# Altium PCB Board2.PcbDoc (part 1 of 2)
Units mil, origin at the board's own origin, x right, y up, seen from the top; angles counter-clockwise.
Board outline 9249 x 8662 mil, 4 copper layers (Top Layer, VCC, GND, Bottom Layer); 176 components, 329 nets, 1628 pads, 337 vias.
Unrouted connection lines stored in the file: 397.
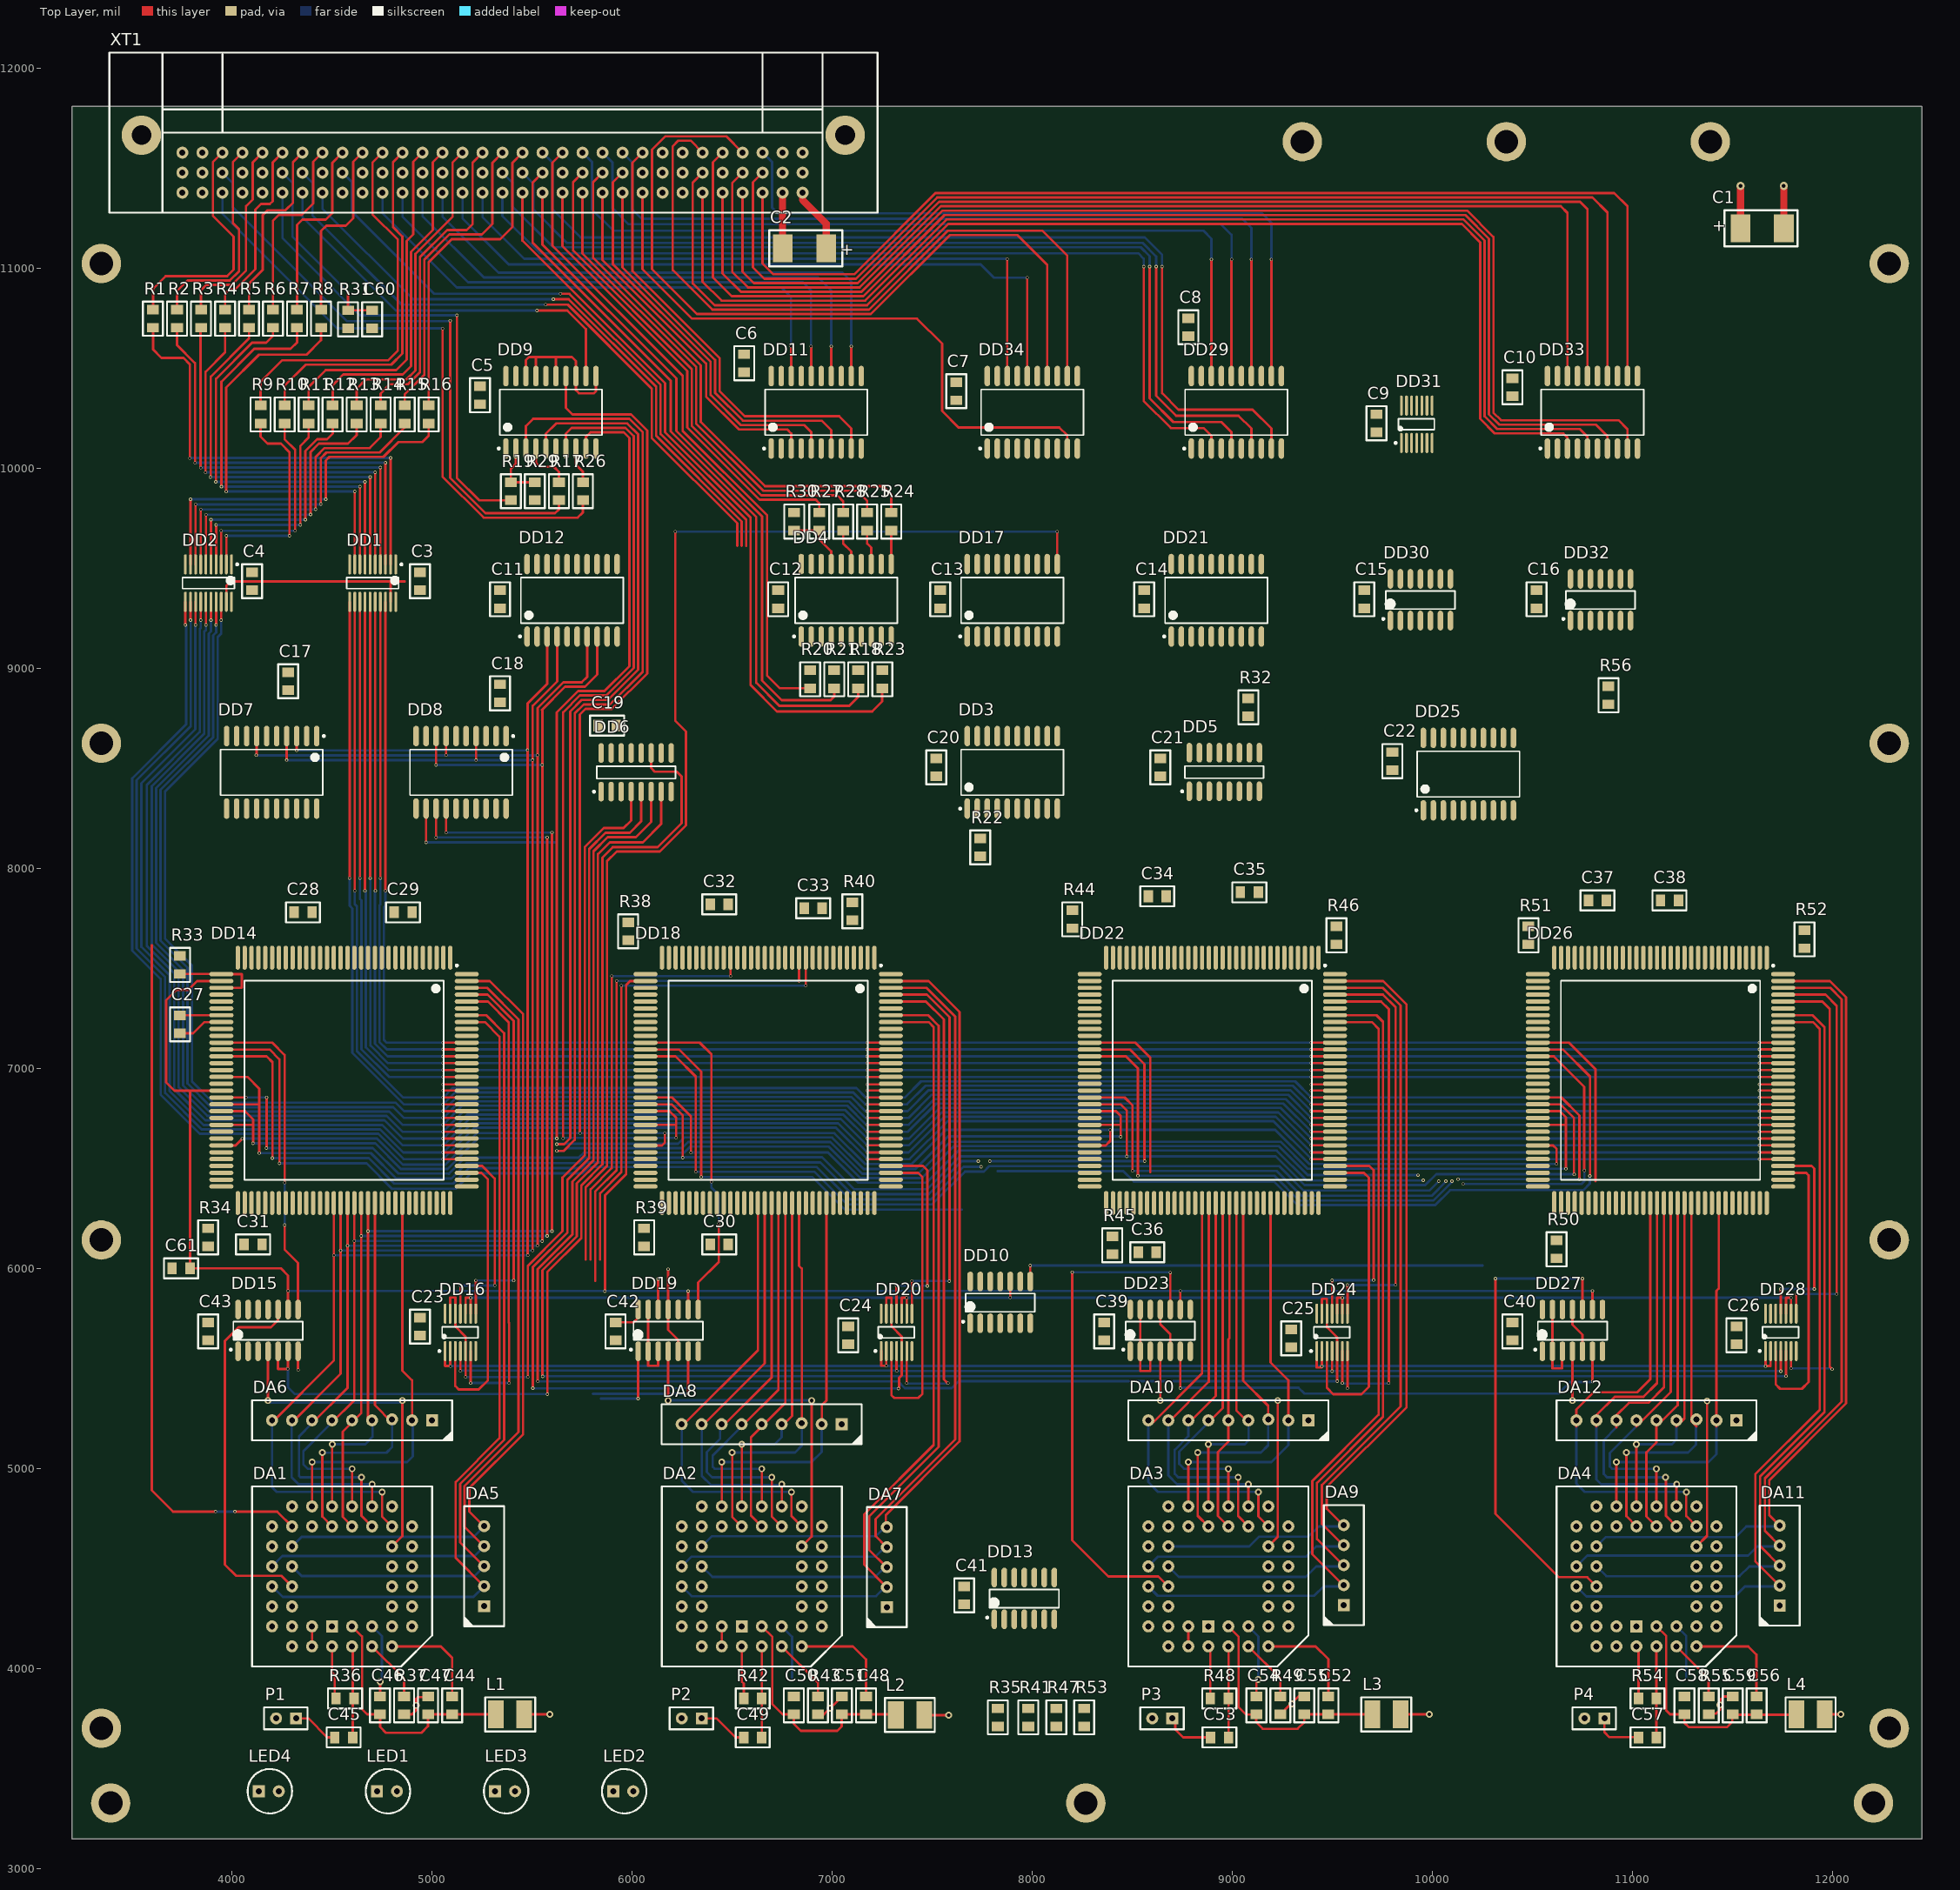
[diagram p0: Top Layer view]
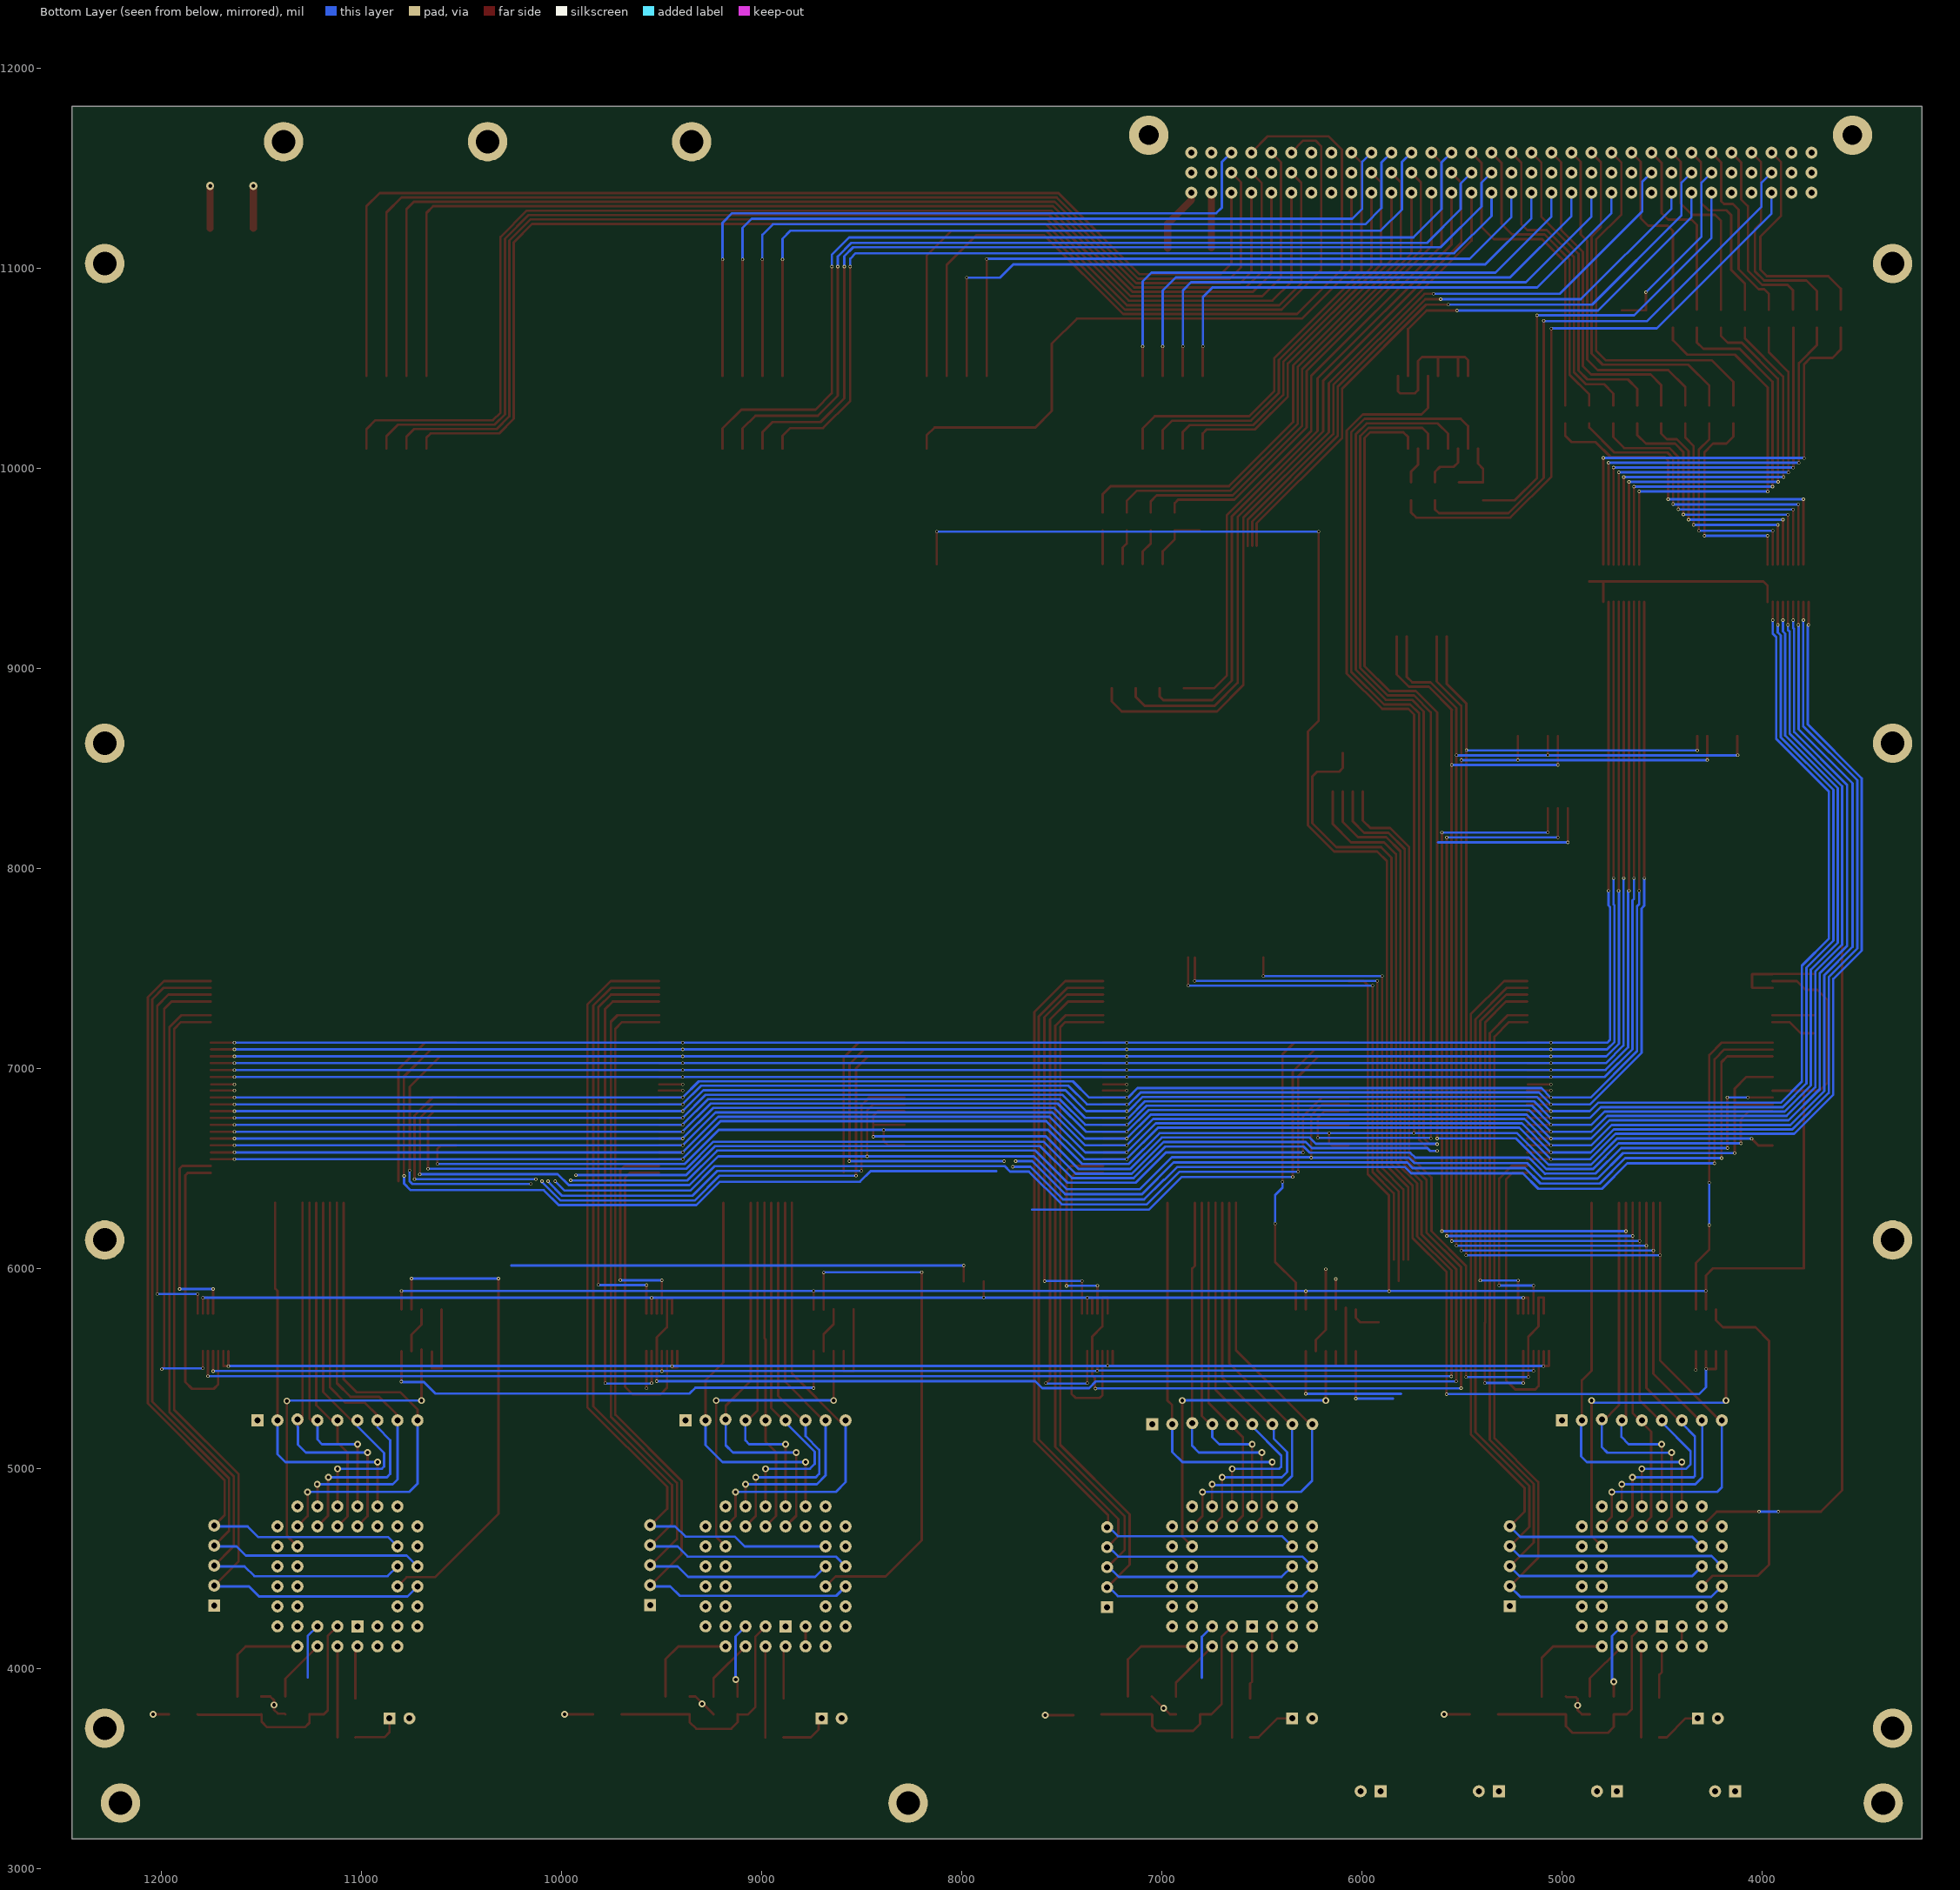
[diagram p1: Bottom Layer view, seen from below]
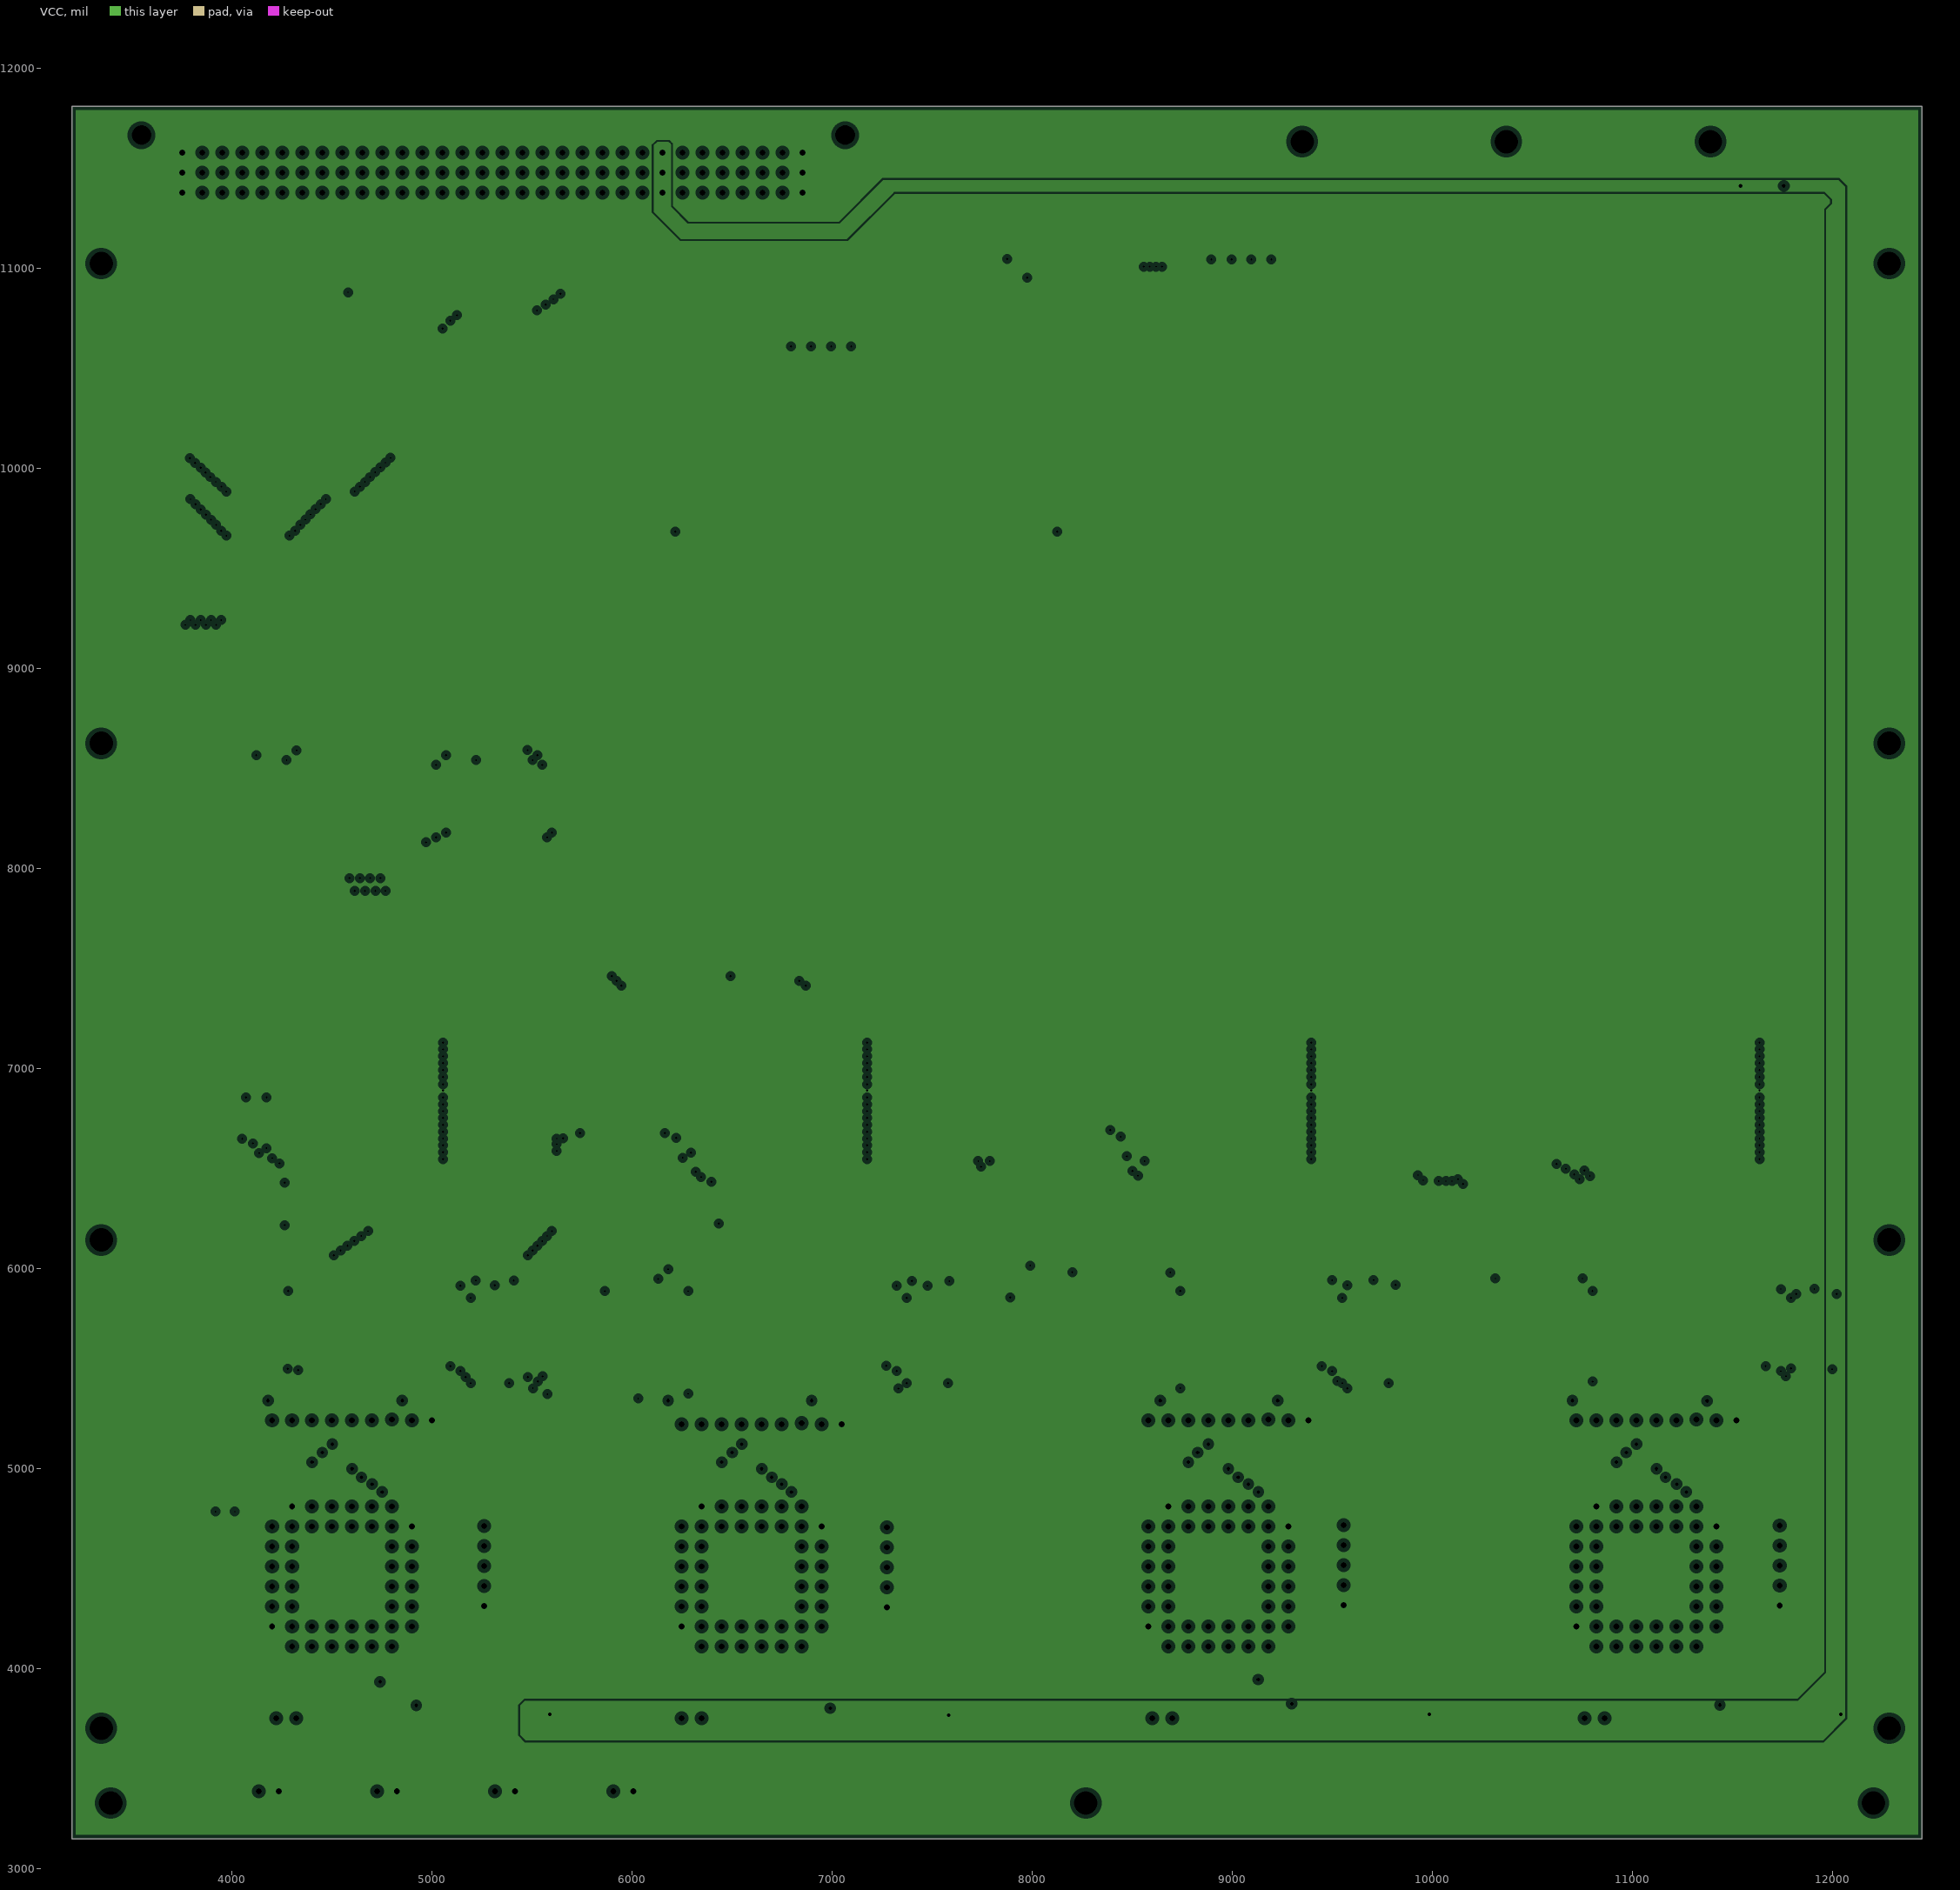
[diagram p2: VCC, clearances drawn from the general rule]
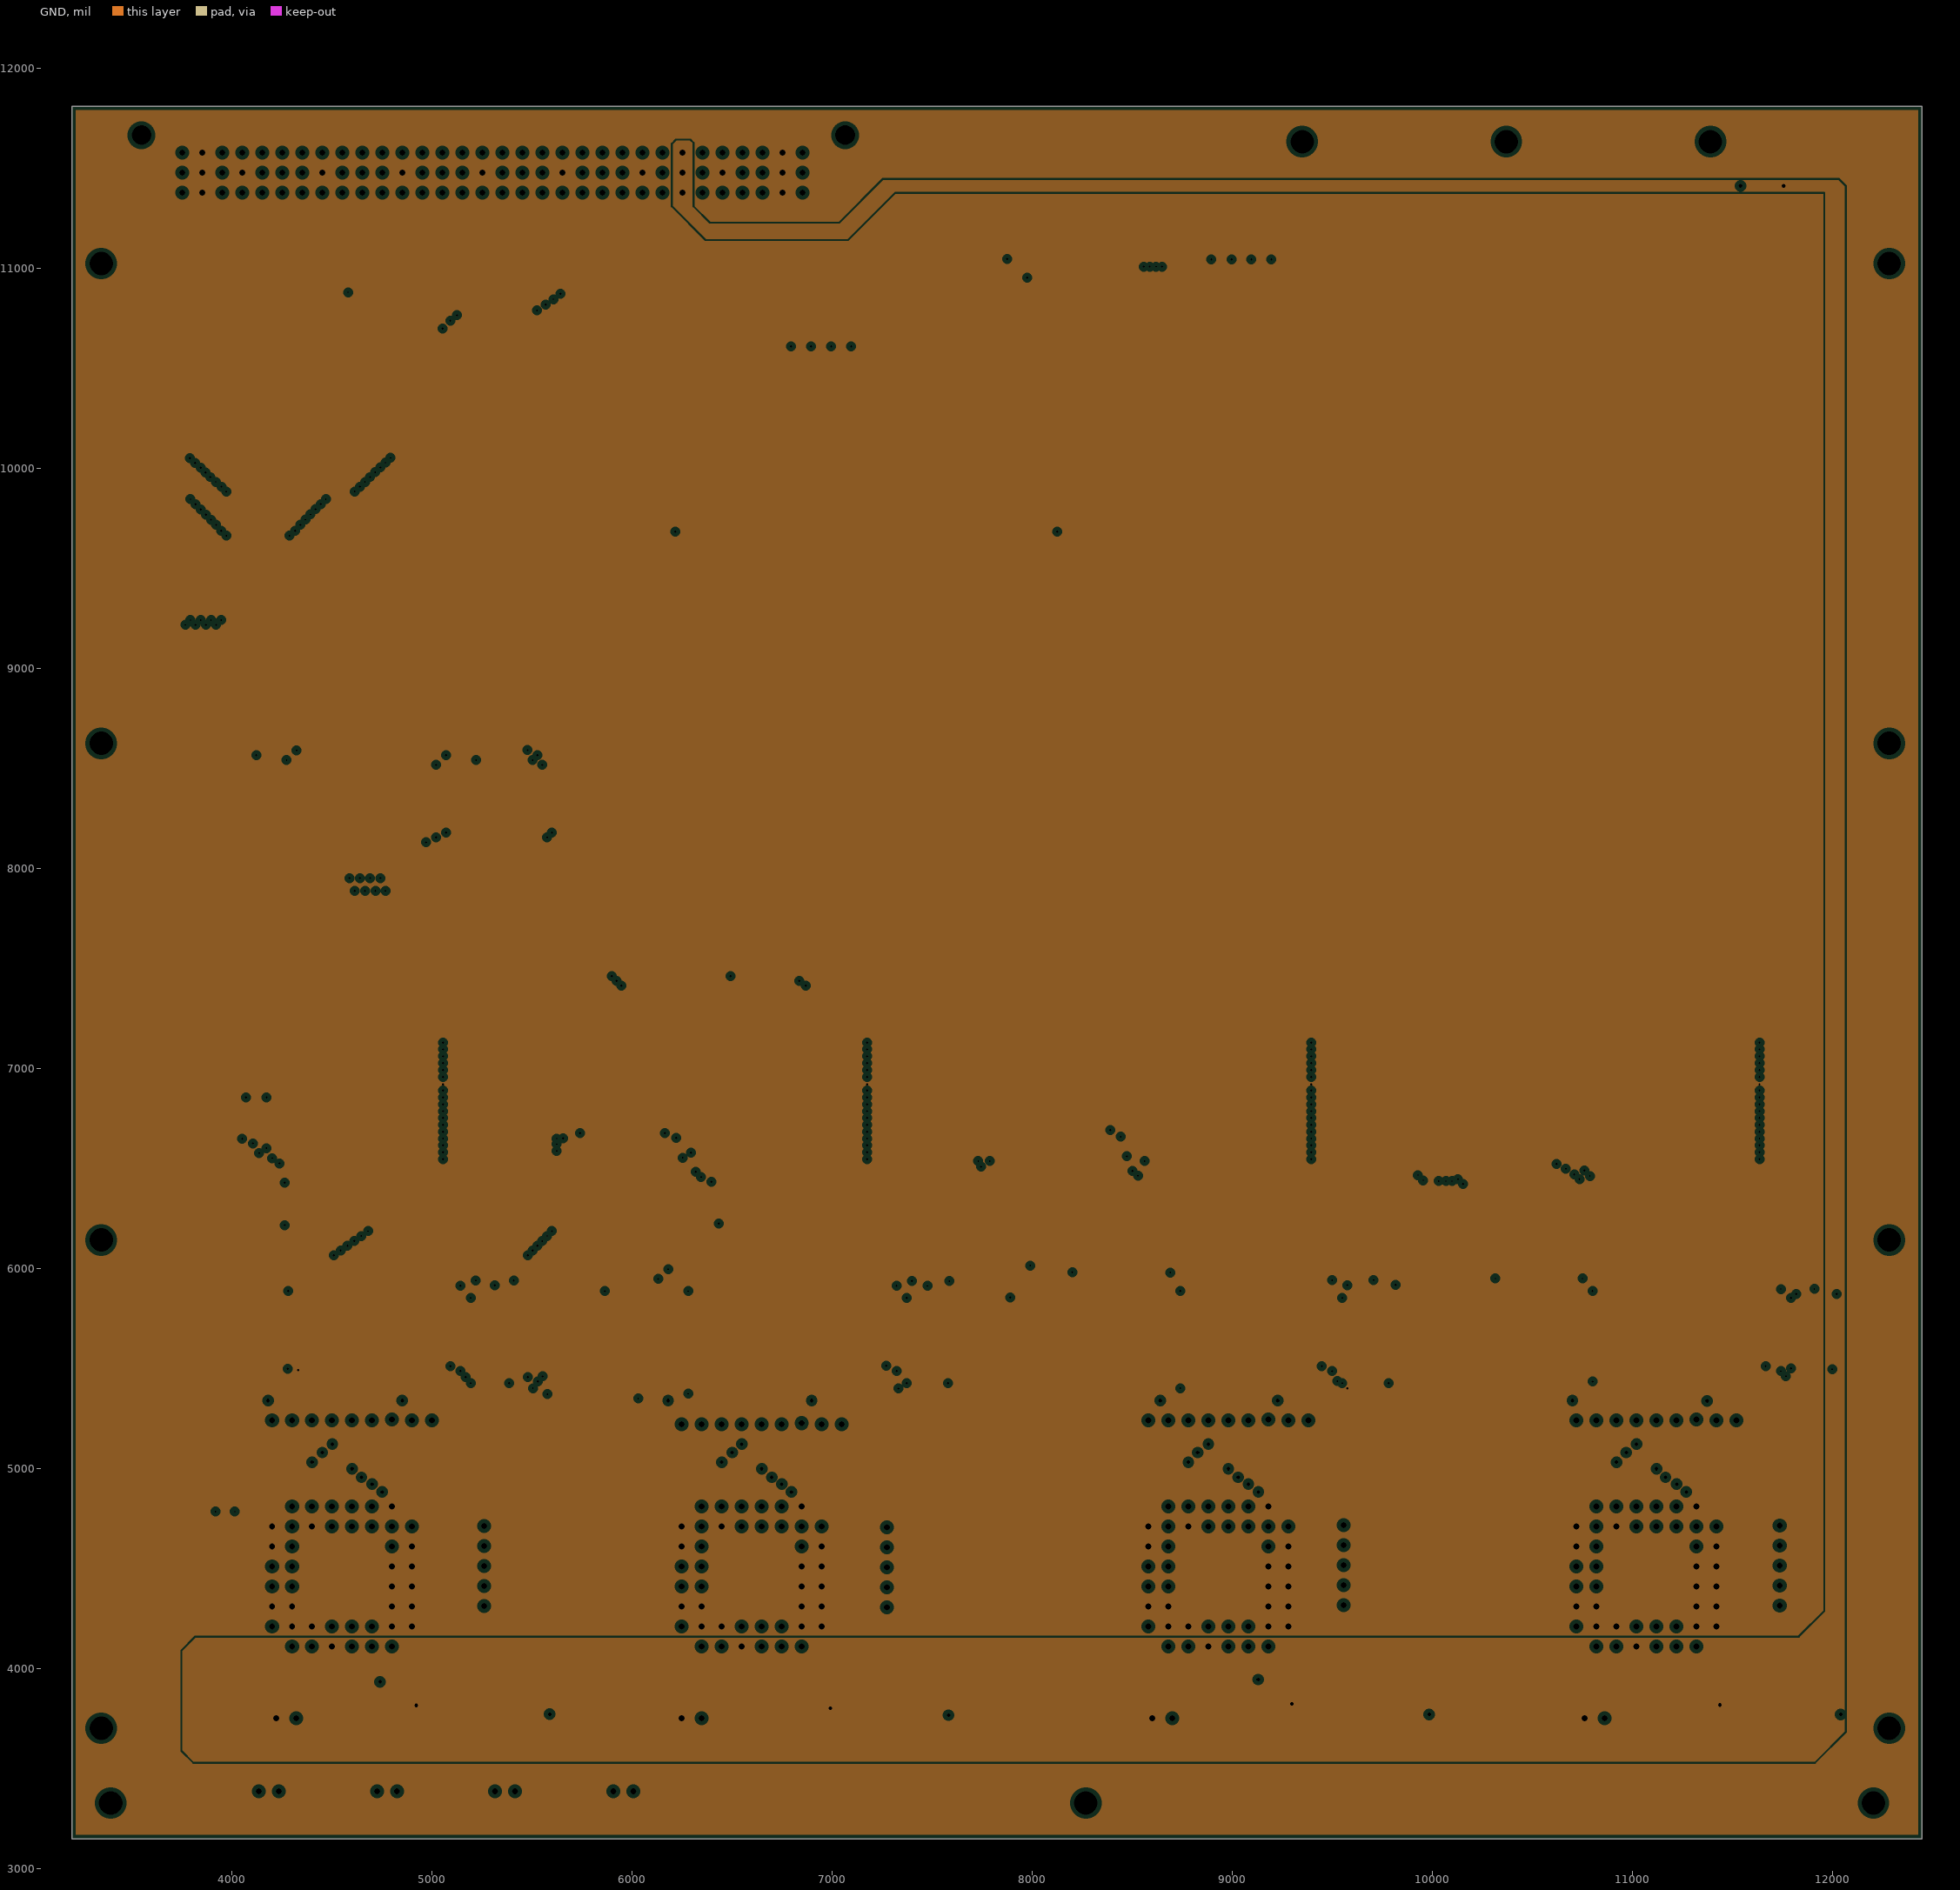
[diagram p3: GND, clearances drawn from the general rule]

## Layer stack, top to bottom
Top Layer: signal copper 1.4
Dielectric: core 12.6, FR-4, Dk 4.8
VCC: plane copper 1.4, net (Multiple Nets)
Dielectric: prepreg 12.6, FR-4, Dk 4.8
GND: plane copper 1.4, net (Multiple Nets)
Dielectric: core 12.6, FR-4, Dk 4.8
Bottom Layer: signal copper 1.4

## Board outline
3199,3148 3199,11810 12448,11810 12448,3148 3199,3148

## Design rules (kind name [scope] priority, off if disabled: settings)
Clearance [All] p1: gap=10
ComponentClearance [All] p1: gap=10 collisioncheckmode=3 verticalgap=10
PlaneClearance [All] p1: clearance=20
PlaneConnect [All] p1: planeconnectstyle=Relief reliefexpansion=20 reliefentries=4 reliefconductorwidth=10 reliefairgap=10
PolygonConnect [All] p1: connectstyle=Relief reliefconductorwidth=10 reliefentries=4 polygonreliefangle="90 Angle"
RoutingVias [All] p1: holewidth=20 width=36 viastyle="Through Hole" minholewidth=8 minwidth=10 maxholewidth=28 maxwidth=50
SolderMaskExpansion [All] p1: expansion=4
TestPointUsage [All] p1: valid=0 allowmultiple=FALSE
Testpoint [All] p1: side=15 testpointundercomponent=TRUE minsize=40 maxsize=100 preferedsize=60 minholesize=0 maxholesize=40 preferedholesize=32 testpointgrid=1 style=1023 order=0123456789
Width [All] p1: maxlimit=36 minlimit=12 preferedwidth=12
16 further rules are at their usual default settings.

## Classes and differential pairs
component class Sheet7: * DD30 DD31 DD32 DD33 DD34 LED1 LED2 LED3 LED4 P1 P2 P3 P4 P5 P6 P7 P8 P9 R56
component class Sheet6: C56 C57 C58 C59 DA4 DA11 DA12 DD13 DD26 DD27 DD28 DD29 L4 R35 R41 R47 R50 R51 R52 R53 R54 R55
component class Sheet5: C52 C53 C54 C55 DA3 DA9 DA10 DD22 DD23 DD24 DD25 L3 R44 R45 R46 R48 R49
component class Sheet4: C48 C49 C50 C51 DA2 DA7 DA8 DD18 DD19 DD20 DD21 L2 R38 R39 R40 R42 R43
component class Sheet3: C44 C45 C46 C47 C61 DA1 DA5 DA6 DD14 DD15 DD16 DD17 L1 R33 R34 R36 R37
component class Sheet2: DD1 DD2 DD3 DD4 DD5 DD6 DD7 DD8 DD9 DD10 DD11 DD12 R32
component class Sheet1: * C1 C2 C3 C4 C5 C6 C7 C8 C9 C10 C11 C12 C13 C14 C15 C16 C17 C18 C19 C20 C21 C22 C23 C24 C25 C26 C27 C28 C29 C30 C31 C32 C33 C34 C35 C36 C37 C38 C39 C40 C41 C42 C43 C60 R1 R2 R3 R4 R5 R6 R7 R8 R9 R10 R11 R12 R13 R14 R15 R16 R17 R18 R19 R20 R21 R22 R23 R24 R25 R26 R27 R28 R29 R30 R31 XT1

## Components (designator, comment, footprint, x,y, rotation, side; value= is the part's Value field where it differs from the comment)
C1 "Cap2" B(1812) 11540,11200 r0 top
C2 "Cap2" B(1812) 6970,11100 r180 top
C3 "Cap" 0805 4940,9480 r270 top
C4 "Cap" 0805 4100,9480 r270 top
C5 "Cap" 0805 5240,10320 r90 top
C6 "Cap" 0805 6560,10480 r90 top
C7 "Cap" 0805 7620,10340 r90 top
C8 "Cap" 0805 8780,10660 r90 top
C9 "Cap" 0805 9720,10180 r90 top
C10 "Cap" 0805 10400,10360 r90 top
C11 "Cap" 0805 5340,9300 r90 top
C12 "Cap" 0805 6730,9300 r90 top
C13 "Cap" 0805 7540,9300 r90 top
C14 "Cap" 0805 8560,9300 r90 top
C15 "Cap" 0805 9660,9300 r90 top
C16 "Cap" 0805 10520,9300 r90 top
C17 "Cap" 0805 4280,8980 r270 top
C18 "Cap" 0805 5340,8920 r270 top
C19 "Cap" 0805 5920,8713 r180 top
C20 "Cap" 0805 7520,8460 r90 top
C21 "Cap" 0805 8640,8460 r90 top
C22 "Cap" 0805 9800,8491 r90 top
C23 "Cap" 0805 4940,5664 r90 top
C24 "Cap" 0805 7080,5620 r90 top
C25 "Cap" 0805 9294,5605 r90 top
C26 "Cap" 0805 11520,5620 r90 top
C27 "Cap" 0805 3740,7175 r90 top
C28 "Cap" 0805 4400,7780 r180 top
C29 "Cap" 0805 4900,7780 r180 top
C30 "Cap" 0805 6480,6120 r180 top
C31 "Cap" 0805 4060,6120 r0 top
C32 "Cap" 0805 6480,7820 r180 top
C33 "Cap" 0805 6860,7800 r0 top
C34 "Cap" 0805 8580,7860 r0 top
C35 "Cap" 0805 9040,7880 r0 top
C36 "Cap" 0805 8620,6080 r180 top
C37 "Cap" 0805 10780,7840 r0 top
C38 "Cap" 0805 11140,7840 r0 top
C39 "Cap" 0805 8360,5640 r90 top
C40 "Cap" 0805 10400,5640 r90 top
C41 "Cap" 0805 7660,4320 r90 top
C42 "Cap" 0805 5917,5640 r90 top
C43 "Cap" 0805 3880,5640 r90 top
C44 "Cap" 0805 5100,3770 r90 top
C45 "Cap" 0805 4603,3655 r180 top
C46 "Cap" 0805 4740,3770 r90 top
C47 "Cap" 0805 4980,3860 r270 top
C48 "Cap" 0805 7169,3770 r90 top
C49 "Cap" 0805 6648,3655 r180 top
C50 "Cap" 0805 6808,3770 r90 top
C51 "Cap" 0805 7049,3860 r270 top
C52 "Cap" 0805 9480,3770 r90 top
C53 "Cap" 0805 8981,3655 r180 top
C54 "Cap" 0805 9120,3770 r90 top
C55 "Cap" 0805 9360,3860 r270 top
C56 "Cap" 0805 11621,3770 r90 top
C57 "Cap" 0805 11120,3655 r180 top
C58 "Cap" 0805 11260,3770 r90 top
C59 "Cap" 0805 11501,3860 r270 top
C60 "Cap" 0805 4700,10700 r90 top
C61 "Cap" 0805 3700,6000 r0 top
DA1 "AD7008JP50" "44 PLCC" 4500,4210 r180 top
DA2 "AD7008JP50" "44 PLCC" 6548,4210 r180 top
DA3 "AD7008JP50" "44 PLCC" 8880,4210 r180 top
DA4 "AD7008JP50" "44 PLCC" 11020,4210 r180 top locked
DA5 "5A103J" "5 SIP" 5260,4311 r90 top
DA6 "9A103J" "9 SIP" 5000,5240 r180 top
DA7 "5A103J" "5 SIP" 7273,4306 r90 top
DA8 "9A103J" "9 SIP" 7047,5221 r180 top
DA9 "5A103J" "5 SIP" 9557,4316 r90 top
DA10 "9A103J" "9 SIP" 9380,5240 r180 top
DA11 "5A103J" "5 SIP" 11736,4314 r90 top
DA12 "9A103J" "9 SIP" 11520,5240 r180 top
DD1 "IN74AC245D" "20 SSOP-4.4" 4703,9426 r270 top
DD2 "IN74AC245D" "20 SSOP-4.4" 3882,9426 r270 top
DD3 "IN74AC244D" "20 SOIC-7.5" 7900,8480 r90 top
DD4 "IN74AC244D" "20 SOIC-7.5" 7070,9340 r90 top
DD5 "IN74AC192D" "16 SOIC-3.9" 8960,8481.5 r90 top
DD6 "SN74AC139D" "16 SOIC-3.9" 6020,8480 r90 top
DD7 "SN74AC374D" "20 SOIC-7.5" 4198,8480 r270 top locked
DD8 "SN74AC374D" "20 SOIC-7.5" 5145,8480 r270 top locked
DD9 "IN74AC244D" "20 SOIC-7.5" 5594,10280 r90 top locked
DD10 "IN74AC04D" "14 SOIC-3.9" 7840,5830 r90 top
DD11 "IN74AC244D" "20 SOIC-7.5" 6920,10280 r90 top
DD12 "SN74AC374D" "20 SOIC-7.5" 5700,9340 r90 top
DD13 "SN74ALS1005D" "14 SOIC-3.9" 7960,4350 r90 top
DD14 "ADSP2181BS1332" "128 PQFP" 4560,6940 r270 top locked
DD15 "IN74AC02D" "14 SOIC-3.9" 4180,5690 r90 top
DD16 "IN74AC08D" "14 TSSOP-4.4" 5180,5680 r90 top
DD17 "SN74AC374D" "20 SOIC-7.5" 7900,9340 r90 top
DD18 "ADSP2181BS1332" "128 PQFP" 6680,6940 r270 top locked
DD19 "IN74AC02D" "14 SOIC-3.9" 6180,5690 r90 top
DD20 "IN74AC08D" "14 TSSOP-4.4" 7360,5680 r90 top
DD21 "SN74AC374D" "20 SOIC-7.5" 8920,9340 r90 top
DD22 "ADSP2181BS1332" "128 PQFP" 8900,6940 r270 top locked
DD23 "IN74AC02D" "14 SOIC-3.9" 8640,5690 r90 top
DD24 "IN74AC08D" "14 TSSOP-4.4" 9537,5680 r90 top
DD25 "SN74AC374D" "20 SOIC-7.5" 10180,8471 r90 top
DD26 "ADSP2181BS1332" "128 PQFP" 11140,6940 r270 top locked
DD27 "IN74AC02D" "14 SOIC-3.9" 10700,5690 r90 top
DD28 "IN74AC08D" "14 TSSOP-4.4" 11780,5680 r90 top
DD29 "IN74AC244D" "20 SOIC-7.5" 9020,10280 r90 top locked
DD30 "IN74AC00D" "14 SOIC-3.9" 9940,9343 r90 top
DD31 "IN74AC08D" "14 TSSOP-4.4" 9960,10220 r90 top
DD32 "IN74AC20D" "14 SOIC-3.9" 10840,9343 r90 top
DD33 "IN74AC244D" "20 SOIC-7.5" 10800,10280 r90 top
DD34 "IN74AC244D" "20 SOIC-7.5" 8000,10280 r90 top
L1 "L" E(1820) 5460,3770 r180 top
L2 "L" E(1820) 7318,3767 r0 top
L3 "L" E(1820) 9700,3770 r0 top
L4 "L" E(1820) 11820,3770 r0 top
LED1 "LED" LED 4724.41,3385.83 r0 top
LED2 "LED" LED 5905.51,3385.83 r0 top
LED3 "LED" LED 5314.96,3385.83 r0 top
LED4 "LED" LED 4133.86,3385.83 r0 top
P1 "PIN2" "2 SIP" 4320,3750 r180 top
P2 "PIN2" "2 SIP" 6348,3750 r180 top
P3 "PIN2" "2 SIP" 8700,3750 r180 top
P4 "PIN2" "2 SIP" 10860,3750 r180 top
R1 "R" 0805 3605,10793 r270 top
R2 "R" 0805 3725,10793 r270 top
R3 "R" 0805 3845,10793 r270 top
R4 "R" 0805 3965,10793 r270 top
R5 "R" 0805 4085,10793 r270 top
R6 "R" 0805 4205,10793 r270 top
R7 "R" 0805 4325,10793 r270 top
R8 "R" 0805 4445,10793 r270 top
R9 "R" 0805 4143,10314 r270 top
R10 "R" 0805 4263,10314 r270 top
R11 "R" 0805 4383,10314 r270 top
R12 "R" 0805 4503,10314 r270 top
R13 "R" 0805 4623,10314 r270 top
R14 "R" 0805 4743,10314 r270 top
R15 "R" 0805 4863,10314 r270 top
R16 "R" 0805 4983,10314 r270 top
R17 "R" 0805 5634,9840 r90 top
R18 "R" 0805 7130,8900 r90 top
R19 "R" 0805 5394,9840 r90 top
R20 "R" 0805 6890,8900 r90 top
R21 "R" 0805 7010,8900 r90 top
R22 "R" 0805 7740,8060 r90 top
R23 "R" 0805 7250,8900 r90 top
R24 "R" 0805 7295,9779 r270 top
R25 "R" 0805 7175,9779 r270 top
R26 "R" 0805 5754,9840 r90 top
R27 "R" 0805 6935,9779 r270 top
R28 "R" 0805 7055,9779 r270 top
R29 "R" 0805 5514,9840 r90 top
R30 "R" 0805 6810,9779 r270 top
R31 "R" 0805 4580,10700 r90 top
R32 "R" 0805 9080,8760 r90 top
R33 "R" 0805 3740,7472 r90 top
R34 "R" 0805 3880,6200 r270 top
R35 "R" 0805 7828,3800 r270 top
R36 "R" 0805 4520,3850 r0 top
R37 "R" 0805 4860,3860 r270 top
R38 "R" 0805 5980,7640 r90 top
R39 "R" 0805 6060,6200 r270 top
R40 "R" 0805 7100,7740 r90 top
R41 "R" 0805 7980,3800 r270 top
R42 "R" 0805 6558,3850 r0 top
R43 "R" 0805 6929,3860 r270 top
R44 "R" 0805 8200,7700 r90 top
R45 "R" 0805 8400,6160 r270 top
R46 "R" 0805 9520,7620 r90 top
R47 "R" 0805 8120,3800 r270 top
R48 "R" 0805 8890,3850 r0 top
R49 "R" 0805 9240,3860 r270 top
R50 "R" 0805 10620,6140 r270 top
R51 "R" 0805 10480,7620 r90 top
R52 "R" 0805 11860,7600 r90 top
R53 "R" 0805 8260,3710 r90 top
R54 "R" 0805 11030,3850 r0 top
R55 "R" 0805 11381,3860 r270 top
R56 "R" 0805 10880,8820 r90 top
XT1 "DS96SL" DS96 3752,11378 r0 top locked

## Footprints (in the part's own frame and the unit in brackets; to place one, negate y for a bottom-side part, rotate by r counter-clockwise, add the part's x,y. Pads: shape width x height; smd on the part's side, far side on the other; paste and mask are expansions set on the pad)
"2 SIP" [mil]
  rect 60x60 hole 30: 1(0,0)
  round 60 hole 30: 2(100,0)
  silkscreen extent -57,-55 160,55
"5 SIP" [mil]
  rect 60x60 hole 30: 1(0,0)
  round 60 hole 30: 2(100,0) 3(200,0) 4(300,0) 5(400,0)
  silkscreen extent -100,-100 500,100
"9 SIP" [mil]
  rect 60x60 hole 30: 1(0,0)
  round 60 hole 30: 2(100,0) 3(200,-5) 4(300,0) 5(400,0) 6(500,0) 7(600,0) 8(700,0) 9(800,0)
  silkscreen extent -100,-100 900,100
"14 SOIC-3.9" [mm]
  oval 2.5x0.7 smd: 1(-2.65,3.81) 2(-2.65,2.54) 3(-2.65,1.27) 4(-2.65,0) 5(-2.65,-1.27) 6(-2.65,-2.54) 7(-2.65,-3.81) 8(2.65,-3.81) 9(2.65,-2.54) 10(2.65,-1.27) 11(2.65,0) 12(2.65,1.27) 13(2.65,2.54) 14(2.65,3.81)
  silkscreen extent -2.57,-4.4 1.12,4.83
"14 TSSOP-4.4" [mm]
  oval 2.55x0.35 smd: 1(-2.375,2.925) 2(-2.375,2.275) 3(-2.375,1.625) 4(-2.375,0.975) 5(-2.375,0.325) 6(-2.375,-0.325) 7(-2.375,-0.975) 8(2.375,-0.975) 9(2.375,-0.325) 10(2.375,0.325) 11(2.375,0.975) 12(2.375,1.625) 13(2.375,2.275) 14(2.375,2.925)
  silkscreen extent -2.5,-1.27 0.7,3.77, body extent -2.25,-1.4 2.25,3.3, height 1.2
"16 SOIC-3.9" [mm]
  oval 2.5x0.7 smd: 1(-2.45,4.445) 2(-2.45,3.175) 3(-2.45,1.905) 4(-2.45,0.635) 5(-2.45,-0.635) 6(-2.45,-1.905) 7(-2.45,-3.175) 8(-2.45,-4.445) 9(2.45,-4.445) 10(2.45,-3.175) 11(2.45,-1.905) 12(2.45,-0.635) 13(2.45,0.635) 14(2.45,1.905) 15(2.45,3.175) 16(2.45,4.445)
  silkscreen extent -2.57,-5 0.76,5.47
"20 SOIC-7.5" [mm]
  oval 2.6x0.7 smd: 1(-4.6,5.715) 2(-4.6,4.445) 3(-4.6,3.175) 4(-4.6,1.905) 5(-4.6,0.635) 6(-4.6,-0.635) 7(-4.6,-1.905) 8(-4.6,-3.175) 9(-4.6,-4.445) 10(-4.6,-5.715) 11(4.6,-5.715) 12(4.6,-4.445) 13(4.6,-3.175) 14(4.6,-1.905) 15(4.6,-0.635) 16(4.6,0.635) 17(4.6,1.905) 18(4.6,3.175) 19(4.6,4.445) 20(4.6,5.715)
  silkscreen extent -4.72,-6.5 2.9,6.74, body extent -3.75,-6.5 3.75,6.5, height 2.65
"20 SSOP-4.4" [mm]
  oval 2.55x0.35 smd: 1(-2.375,2.925) 2(-2.375,2.275) 3(-2.375,1.625) 4(-2.375,0.975) 5(-2.375,0.325) 6(-2.375,-0.325) 7(-2.375,-0.975) 8(-2.375,-1.625) 9(-2.375,-2.275) 10(-2.375,-2.925) 11(2.375,-2.925) 12(2.375,-2.275) 13(2.375,-1.625) 14(2.375,-0.975) 15(2.375,-0.325) 16(2.375,0.325) 17(2.375,0.975) 18(2.375,1.625) 19(2.375,2.275) 20(2.375,2.925)
  silkscreen extent -2.5,-3.3 0.7,3.78, body extent -2.25,-3.3 2.25,3.3, height 1.2
"44 PLCC" [mil]
  rect 60x60 hole 30: 1(0,0)
  round 60 hole 30: 2(-100,100) 3(-100,0) 4(-200,100) 5(-200,0) 6(-300,100) 7(-400,0) 8(-300,0) 9(-400,-100) 10(-300,-100) 11(-400,-200) 12(-300,-200) 13(-400,-300) 14(-300,-300) 15(-400,-400) 16(-300,-400) 17(-400,-500) 18(-300,-600) 19(-300,-500) 20(-200,-600) 21(-200,-500) 22(-100,-600) 23(-100,-500) 24(0,-600) 25(0,-500) 26(100,-600) 27(100,-500) 28(200,-600) 29(300,-500) 30(200,-500) 31(300,-400) 32(200,-400) 33(300,-300) 34(200,-300) 35(300,-200) 36(200,-200) 37(300,-100) 38(200,-100) 39(300,0) 40(200,100) 41(200,0) 42(100,100) 43(100,0) 44(0,100)
  silkscreen extent -500,-700 400,200
"128 PQFP" [mm]
  oval 3.05x0.55 smd: 1(-15.575,13.485) 2(-15.575,12.615) 3(-15.575,11.745) 4(-15.575,10.875) 5(-15.575,10.005) 6(-15.575,9.135) 7(-15.575,8.265) 8(-15.575,7.395) 9(-15.575,6.525) 10(-15.575,5.655) 11(-15.575,4.785) 12(-15.575,3.915) 13(-15.575,3.045) 14(-15.575,2.175) 15(-15.575,1.305) 16(-15.575,0.435) 17(-15.575,-0.435) 18(-15.575,-1.305) 19(-15.575,-2.175) 20(-15.575,-3.045) 21(-15.575,-3.915) 22(-15.575,-4.785) 23(-15.575,-5.655) 24(-15.575,-6.525) 25(-15.575,-7.395) 26(-15.575,-8.265) 27(-15.575,-9.135) 28(-15.575,-10.005) 29(-15.575,-10.875) 30(-15.575,-11.745) 31(-15.575,-12.615) 32(-15.575,-13.485) 65(15.575,-13.485) 66(15.575,-12.615) 67(15.575,-11.745) 68(15.575,-10.875) 69(15.575,-10.005) 70(15.575,-9.135) 71(15.575,-8.265) 72(15.575,-7.395) 73(15.575,-6.525) 74(15.575,-5.655) 75(15.575,-4.785) 76(15.575,-3.915) 77(15.575,-3.045) 78(15.575,-2.175) 79(15.575,-1.305) 80(15.575,-0.435) 81(15.575,0.435) 82(15.575,1.305) 83(15.575,2.175) 84(15.575,3.045) 85(15.575,3.915) 86(15.575,4.785) 87(15.575,5.655) 88(15.575,6.525) 89(15.575,7.395) 90(15.575,8.265) 91(15.575,9.135) 92(15.575,10.005) 93(15.575,10.875) 94(15.575,11.745) 95(15.575,12.615) 96(15.575,13.485)
  oval 0.55x3.05 smd: 33(-13.485,-15.575) 34(-12.615,-15.575) 35(-11.745,-15.575) 36(-10.875,-15.575) 37(-10.005,-15.575) 38(-9.135,-15.575) 39(-8.265,-15.575) 40(-7.395,-15.575) 41(-6.525,-15.575) 42(-5.655,-15.575) 43(-4.785,-15.575) 44(-3.915,-15.575) 45(-3.045,-15.575) 46(-2.175,-15.575) 47(-1.305,-15.575) 48(-0.435,-15.575) 49(0.435,-15.575) 50(1.305,-15.575) 51(2.175,-15.575) 52(3.045,-15.575) 53(3.915,-15.575) 54(4.785,-15.575) 55(5.655,-15.575) 56(6.525,-15.575) 57(7.395,-15.575) 58(8.265,-15.575) 59(9.135,-15.575) 60(10.005,-15.575) 61(10.875,-15.575) 62(11.745,-15.575) 63(12.615,-15.575) 64(13.485,-15.575) 97(13.485,15.575) 98(12.615,15.575) 99(11.745,15.575) 100(10.875,15.575) 101(10.005,15.575) 102(9.135,15.575) 103(8.265,15.575) 104(7.395,15.575) 105(6.525,15.575) 106(5.655,15.575) 107(4.785,15.575) 108(3.915,15.575) 109(3.045,15.575) 110(2.175,15.575) 111(1.305,15.575) 112(0.435,15.575) 113(-0.435,15.575) 114(-1.305,15.575) 115(-2.175,15.575) 116(-3.045,15.575) 117(-3.915,15.575) 118(-4.785,15.575) 119(-5.655,15.575) 120(-6.525,15.575) 121(-7.395,15.575) 122(-8.265,15.575) 123(-9.135,15.575) 124(-10.005,15.575) 125(-10.875,15.575) 126(-11.745,15.575) 127(-12.615,15.575) 128(-13.485,15.575)
  silkscreen extent -14.7,-12.65 12.65,14.44, body extent -14,-14 14,14, height 4.07
0805 [mm]
  rect 1.2x1.5 smd: 1(0,0) 2(2.286,0)
  silkscreen extent -1.02,-1.27 3.3,1.27
B(1812) [mm]
  rect 2.5x3.5 smd: 1(0,0) 2(5.5,0)
  silkscreen extent -2.03,-2.29 7.24,2.29
DS96 [mil]
  round 60 hole 30: 1A(0,200) 1B(0,100) 1C(0,0) 2A(100,200) 2B(100,100) 2C(100,0) 3A(200,200) 3B(200,100) 3C(200,0) 4A(300,200) 4B(300,100) 4C(300,0) 5A(400,200) 5B(400,100) 5C(400,0) 6A(500,200) 6B(500,100) 6C(500,0) 7A(600,200) 7B(600,100) 7C(600,0) 8A(700,200) 8B(700,100) 8C(700,0) 9A(800,200) 9B(800,100) 9C(800,0) 10A(900,200) 10B(900,100) 10C(900,0) 11A(1000,200) 11B(1000,100) 11C(1000,0) 12A(1100,200) 12B(1100,100) 12C(1100,0) 13A(1200,200) 13B(1200,100) 13C(1200,0) 14A(1300,200) 14B(1300,100) 14C(1300,0) 15A(1400,200) 15B(1400,100) 15C(1400,0) 16A(1500,200) 16B(1500,100) 16C(1500,0) 17A(1600,200) 17B(1600,100) 17C(1600,0) 18A(1700,200) 18B(1700,100) 18C(1700,0) 19A(1800,200) 19B(1800,100) 19C(1800,0) 20A(1900,200) 20B(1900,100) 20C(1900,0) 21A(2000,200) 21B(2000,100) 21C(2000,0) 22A(2100,200) 22B(2100,100) 22C(2100,0) 23A(2200,200) 23B(2200,100) 23C(2200,0) 24A(2300,200) 24B(2300,100) 24C(2300,0) 25A(2400,200) 25B(2400,100) 25C(2400,0) 26A(2500,200) 26B(2500,100) 26C(2500,0) 27A(2600,200) 27B(2600,100) 27C(2600,0) 28A(2700,200) 28B(2700,100) 28C(2700,0) 29A(2800,200) 29B(2800,100) 29C(2800,0) 30A(2900,200) 30B(2900,100) 30C(2900,0) 31A(3000,200) 31B(3000,100) 31C(3000,0) 32A(3100,200) 32B(3100,100) 32C(3100,0)
  round 196.85 hole 98.43: 3(-204.72,287.4) 4(3312.6,287.4)
  silkscreen extent -365,-100 3475,700
E(1820) [mm]
  rect 2x3.5 smd: 1(0,0) 2(3.6,0)
  silkscreen extent -1.4,-2.16 4.95,2.16
LED [mil]
  rect 60x60 hole 30: 1(0,0)
  round 60 hole 30: 2(100,0)
  silkscreen extent -56,-111 166,111

## Free pads (board coordinates)
  round 196.85 hole 118.11: 0(3346.46,3700.79) 0(3346.46,6141.73) 0(3346.46,8625) 0(3346.46,11023.62) 0(3393.7,3326.77) 0(8267.72,3326.77) 0(9349.4,11633) 0(10369.41,11633) 0(11389.63,11633) 0(12204.72,3326.77) 0(12283.46,3700.79) 0(12283.46,6141.73) 0(12283.46,8625) 0(12283.46,11023.62)

## Via types
v1: diameter 16, hole 10, Top Layer to Bottom Layer, 289 vias
v2: diameter 34, hole 18, Top Layer to Bottom Layer, 46 vias
v3: diameter 40, hole 20, Top Layer to Bottom Layer, 2 vias

## Nets (pads, with @x,y where several pads share a name; then routed paths per layer and width w, separated by ;. In a path a pad name is that pad's centre, name@x,y a point inside that pad or via, vN(x,y) a via of type N, cw(c..) or ccw(c..) an arc to the next point about the centre after c; other vN are vias at no path point)
A01: R1.1 XT1.3A | length 1195.3
  Top Layer w12: R1.1@3605,10793 3605,10898 3668,10961 3976,10961 4008,10993 4008,11158 3904,11262 3904,11530 XT1.3A@3952,11578
A02: R2.1 XT1.4A | length 1069.7
  Top Layer w12: R2.1@3725,10793 3725,10886 3778,10939 3989,10939 4035,10985 4035,11196 4004,11227 4004,11530 XT1.4A@4052,11578
A03: R3.1 XT1.5A | length 986.6
  Top Layer w12: R3.1@3845,10793 3845,10890 3872,10917 3999,10917 4070,10988 4070,11310 4103,11343 4103,11529 XT1.5A@4152,11578
A04: R4.1 XT1.6A | length 946.1
  Top Layer w12: R4.1@3965,10793 3965,10872 3988,10895 4016,10895 4117,10996 4117,11293 4145,11321 4189,11321 4203,11335 4203,11529 XT1.6A@4252,11578
A05: R5.1 XT1.7A | length 948.3
  Top Layer w12: R5.1@4085,10793 4085,10924 4153,10992 4153,11266 4177,11290 4267,11290 4305,11328 4305,11531 XT1.7A@4352,11578
A06: R6.1 XT1.8A | length 954.7
  Top Layer w12: R6.1@4205,10793 4205,11238 4234,11267 4349,11267 4406,11324 4406,11532 XT1.8A@4452,11578
A07: R7.1 XT1.9A | length 948.1
  Top Layer w12: R7.1@4325,10793 4325,11217 4351,11243 4469,11243 4501,11275 4501,11527 XT1.9A@4552,11578
A08: R8.1 XT1.10A | length 927.6
  Top Layer w12: R8.1@4445,10793 4445,11186 4472,11213 4569,11213 4606,11250 4606,11532 XT1.10A@4652,11578
A09: R9.1 XT1.11A | length 1931.9
  Top Layer w12: R9.1@4143,10314 4143,10432 4251,10540 4781,10540 4829,10588 4829,11143 4702,11270 4702,11528 XT1.11A@4752,11578
A10: R10.1 XT1.12A | length 1796.2
  Top Layer w12: R10.1@4263,10314 4263,10412 4369,10518 4796,10518 4851,10573 4851,11159 4805,11205 4805,11531 XT1.12A@4852,11578
A11: R11.1 XT1.13A | length 1706.5
  Top Layer w12: R11.1@4383,10314 4383,10406 4468,10491 4821,10491 4873,10543 4873,11136 4906,11169 4906,11532 XT1.13A@4952,11578
A12: R12.1 XT1.14A | length 1665.4
  Top Layer w12: R12.1@4503,10314 4503,10416 4556,10469 4853,10469 4895,10511 4895,11082 5004,11191 5004,11530 XT1.14A@5052,11578
A13: R13.1 XT1.15A | length 1601.4
  Top Layer w12: R13.1@4623,10314 4623,10397 4670,10444 4872,10444 4917,10489 4917,11072 5102,11257 5102,11528 XT1.15A@5152,11578
A14: R14.1 XT1.16A | length 1585.5
  Top Layer w12: R14.1@4743,10314 4743,10374 4789,10420 4880,10420 4939,10479 4939,11055 5075,11191 5173,11191 5203,11221 5203,11529 XT1.16A@5252,11578
A15: R15.1 XT1.17A | length 1561.4
  Top Layer w12: R15.1@4863,10314 4863,10369 4961,10467 4961,11043 5087,11169 5249,11169 5301,11221 5301,11527 XT1.17A@5352,11578
A16: R16.1 XT1.18A | length 1600
  Top Layer w12: R16.1@4983,10314 4983,11030 5098,11145 5340,11145 5401,11206 5401,11527 XT1.18A@5452,11578
A17: R17.1 XT1.3B | length 2972.6
  Top Layer w12: v1(5090.67,10737) 5090.67,9951.33 5267,9775 5615,9775 5634,9794 R17.1@5634,9840
  Bottom Layer w12: XT1.3B@3952,11478 4002,11428 4002,11308 4575,10735 v1@5090.67,10735
A18: R18.1 XT1.19B | length 3652.4
  Top Layer w12: XT1.19B@5552,11478 5503,11429 5503,11127 6192.59,10437.41 6192.59,10184.41 6620.51,9756.49 6620.51,8927.2 6735.2,8812.51 7085.51,8812.51 7130,8857 R18.1@7130,8900
A19: C60.2 DD9.6 R31.2 XT1.6B | length 943.9
  Top Layer w12: v1(4580,10880) R31.2@4580,10790 C60.2@4700,10790
  Bottom Layer w12: XT1.6B@4252,11478 4302,11428 4302,11158 v1(4580,10880)
A20: R20.1 XT1.20A | length 3320.7
  Top Layer w12: XT1.20A@5652,11578 5602,11528 5602,11113 6252.7,10462.3 6252.7,10187.3 6674,9766 6674,8965 6739,8900 R20.1@6890,8900
A21: R21.1 XT1.19C | length 3343.4
  Top Layer w12: XT1.19C@5552,11378 5552,11118.3 6221.09,10449.21 6221.09,10187.21 6649,9759.3 6649,8939 6747,8841 6992,8841 7010,8859 R21.1@7010,8900
A22: R22.1 XT1.9B | length 3097.8
  Top Layer w12: v1(5642,10872) 5686.89,10872 6142,10416.89 6142,10171.5 6570,9743.5 6570,9612
  Bottom Layer w12: XT1.9B@4552,11478 4598,11432 4598,11285 5011,10872 v1(5642,10872)
A23: R23.1 XT1.18C | length 3733.6
  Top Layer w12: XT1.18C@5452,11378 5452,11138 6164.31,10425.69 6164.31,10180.69 6592.22,9752.78 6592.22,8915.48 6723.48,8784.22 7200.22,8784.22 7250,8834 R23.1@7250,8900
A24: R24.1 XT1.22B | length 2681.8
  Top Layer w12: XT1.22B@5852,11478 5805,11431 5805,11052.34 6342.71,10514.63 6342.71,10231.29 6664,9910 7255,9910 7295,9870 R24.1@7295,9779
A25: R25.1 XT1.21C | length 2463.4
  Top Layer w12: XT1.21C@5752,11378 5752,11074 6320.55,10505.45 6320.55,10222.11 6654.82,9887.84 7124.16,9887.84 7175,9837 R25.1@7175,9779
A26: R26.1 XT1.3C | length 3040.9
  Top Layer w12: v1(5052,10699) 5052,9958.89 5257.89,9753 5728,9753 5754,9779 R26.1@5754,9840
  Bottom Layer w12: XT1.3C@3952,11378 3952,11274 4526,10700 v1@5052,10700
A27: R27.1 XT1.20C | length 2295.6
  Top Layer w12: XT1.20C@5652,11378 5652,11110.46 6275.62,10486.84 6275.62,10203.5 6636.21,9842.91 6918.09,9842.91 6935,9826 R27.1@6935,9779
A28: R19.1 XT1.6C | length 2389.3
  Top Layer w12: v1@5124,10766 5124,9951 5235,9840 R19.1@5394,9840
  Bottom Layer w12: XT1.6C@4252,11378 4252,11152 4639,10765 v1(5124,10765)
A29: R28.1 XT1.21B | length 2499.9
  Top Layer w12: XT1.21B@5752,11478 5705,11431 5705,11089 6297.92,10496.08 6297.92,10212.73 6645.45,9865.21 7024.79,9865.21 7055,9835 R28.1@7055,9779
A30: DD10.13 XT1.7B | length 3252.7
  Top Layer w12: v1(5568,10818) 5678.66,10818 6098,10398.66 6098,10152 6525.1,9724.9 6525.1,9612
  Bottom Layer w12: XT1.7B@4352,11478 4402,11428 4402,11264 4848,10818 v1(5568,10818)
A34: DD9.2 R19.2 R29.2 | length 299.3
  Top Layer w12: DD9.2@5419,10098.9 5419,10023 5394,9998 R19.2@5394,9930 R29.2@5514,9930
A36: DD1.2 R1.2 | length 2327.7
  Top Layer w12: R1.2@3605,10703 3605,10594 3647,10552 3757,10552 3789,10520 v1@3789,10052 ; DD1.2@4792.57,9519.5 v1(4792.57,10052)
  Bottom Layer w12: v1@3789,10052 v1(4792.57,10052)
  other v1: 3789,10051
A37: DD1.3 R2.2 | length 2172.8
  Top Layer w12: R2.2@3725,10703 3725,10616 3815,10526 v1(3815,10027) ; DD1.3@4766.98,9519.5 v1(4766.98,10028)
  Bottom Layer w12: v1@3816,10028 v1(4766.98,10028)
A38: DD1.4 R3.2 | length 2081.9
  Top Layer w12: v1@3843,10004 R3.2@3843,10703 ; DD1.4@4741.39,9519.5 v1(4741.39,10004)
  Bottom Layer w12: v1@3843,10004 v1(4741.39,10004)
  other v1: 3843,10003
A39: DD1.5 R4.2 | length 2071.5
  Top Layer w12: v1@3868,9980 3868,10482 3965,10579 R4.2@3965,10703 ; DD1.5@4715.8,9519.5 v1(4715.8,9980)
  Bottom Layer w12: v1@3868,9980 v1(4715.8,9980)
  other v1: 3867,9979
A40: DD1.6 R5.2 | length 2058.8
  Top Layer w12: v1@3894,9956 3894,10458 4085,10649 R5.2@4085,10703 ; DD1.6@4690.2,9519.5 v1(4690.2,9956)
  Bottom Layer w12: v1@3894,9956 v1(4690.2,9956)
  other v1: 3892,9956
A41: DD1.7 R6.2 | length 2087.8
  Top Layer w12: v1@3920,9932 3920,10448 4100,10628 4171,10628 4205,10662 R6.2@4205,10703 ; DD1.7@4664.61,9519.5 v1(4664.61,9932)
  Bottom Layer w12: v1@3920,9932 v1(4664.61,9932)
  other v1: 3919,9932
A42: DD1.8 R7.2 | length 2140.7
  Top Layer w12: v1(3947,9908) 3947,10433 4111,10597 4293,10597 4325,10629 R7.2@4325,10703 ; DD1.8@4639.02,9519.5 v1(4639.02,9908)
  Bottom Layer w12: v1@3945,9908 v1(4639.02,9908)
A43: DD1.9 R8.2 | length 2162.7
  Top Layer w12: v1(3971,9883) 3971,10404 4135,10568 4373,10568 4445,10640 R8.2@4445,10703 ; DD1.9@4613.43,9519.5 v1(4613.43,9884)
  Bottom Layer w12: v1@3971,9884 v1(4613.43,9884)
A44: DD2.2 R9.2 | length 1118.2
  Top Layer w12: DD2.2@3971.57,9519.5 v1(3971.57,9662.57) ; R9.2@4143,10224 4143,10158 4178,10123 4244,10123 4287,10080 v1(4287,9662.57)
  Bottom Layer w12: v1(3971.57,9662.57) v1(4287,9662.57)
A45: DD2.3 R10.2 | length 1095.6
  Top Layer w12: DD2.3@3945.98,9519.5 v1(3945.98,9688) ; R10.2@4263,10224 4263,10145 4315.46,10092.54 v1(4315.46,9688.13)
  Bottom Layer w12: v1(3945.98,9688) v1@4315.46,9688
A46: DD2.4 R11.2 | length 1142.5
  Top Layer w12: DD2.4@3920.39,9519.5 v1(3920.39,9717.18) ; v1@4341.05,9717.18 4341.05,10111.05 4383,10153 R11.2@4383,10224
  Bottom Layer w12: v1(3920.39,9717.18) v1@4341.05,9717.18
  other v1: 4341.05,9717.13
A47: DD2.5 R12.2 | length 1261.7
  Top Layer w12: DD2.5@3894.8,9519.5 v1(3894.8,9742.77) ; v1(4366.64,9743.13) 4366.64,10086.64 4425,10145 4475,10145 4503,10173 R12.2@4503,10224
  Bottom Layer w12: v1(3894.8,9742.77) v1@4366.64,9742.77
A48: DD2.6 R13.2 | length 1407.8
  Top Layer w12: DD2.6@3869.2,9519.5 v1(3869.2,9768.36) ; v1(4392.23,9769.13) 4392.23,10081.12 4434.11,10123 4580,10123 4623,10166 R13.2@4623,10224
  Bottom Layer w12: v1(3869.2,9768.36) v1@4392.23,9768.36
A49: DD2.7 R14.2 | length 1544
  Top Layer w12: DD2.7@3843.61,9519.5 v1(3843.61,9793.95) ; v1(4417.82,9795.13) 4417.82,10055.82 4463,10101 4688,10101 4743,10156 R14.2@4743,10224
  Bottom Layer w12: v1(3843.61,9793.95) v1@4417.82,9793.95
A50: DD2.8 R15.2 | length 1658.4
  Top Layer w12: DD2.8@3818.02,9519.5 v1(3818.02,9819.54) ; v1(4443.41,9821.13) 4443.41,10050.3 4472.11,10079 4739,10079 4863,10203 R15.2@4863,10224
  Bottom Layer w12: v1(3818.02,9819.54) v1@4443.41,9819.54
A51: DD2.9 R16.2 | length 1822.4
  Top Layer w12: DD2.9@3792.43,9519.5 v1(3792.43,9845.13) ; v1(4469,9845.13) 4469,10039 4487,10057 4757,10057 4831,10131 4951,10131 4983,10163 R16.2@4983,10224
  Bottom Layer w12: v1(3792.43,9845.13) v1(4469,9845.13)
A52: DD9.4 R17.2 | length 257
  Top Layer w12: DD9.4@5519,10098.9 5519,10028 5540,10007 5609,10007 5634,9982 R17.2@5634,9930
A53: DD4.6 R18.2
A54: DD4.2 R20.2
A55: DD4.4 R21.2
A56: DD3.2 R22.2
A57: DD4.8 R23.2
A58: DD4.11 R24.2 | length 167.9
  Top Layer w12: DD4.11@7295,9521.1 R24.2@7295,9689
A59: DD4.13 R25.2 | length 176.2
  Top Layer w12: R25.2@7175,9689 7175,9623 7195,9603 DD4.13@7195,9521.1
A60: DD9.8 R26.2 | length 183.4
  Top Layer w12: DD9.8@5719,10098.9 5719,10018 5754,9983 R26.2@5754,9930
A61: DD4.17 R27.2 R30.2 | length 317.8
  Top Layer w12: R30.2@6810,9689 R27.2@6935,9689 6935,9645 6995,9585 DD4.17@6995,9521.1
A62: DD4.15 R28.2 | length 184.5
  Top Layer w12: R28.2@7055,9689 7055,9624 7095,9584 DD4.15@7095,9521.1
A63: DD1.1 DD2.1 DD4.14
B01: DD1.18 DD14.118 DD18.118 DD22.118 DD26.118 | length 9548.8
  Top Layer w12: v1(4766.98,7887) DD1.18@4766.98,9332.5 ; v1(5055,7128) DD14.118@5172.8,7128 ; v1(7175,7128) DD18.118@7292.8,7128 ; v1(9395,7128) DD22.118@9512.8,7128 ; v1(11635,7128) DD26.118@11752.8,7128
  Bottom Layer w12: v1(4766.98,7887) 4766.98,7813.98 4759,7806 4759,7142 4773,7128 v1@11637,7128
B02: DD1.17 DD14.117 DD18.117 DD22.117 DD26.117 | length 9586.8
  Top Layer w12: v1(4741.39,7951) DD1.17@4741.39,9332.5 ; v1(5055,7095) DD14.117@5172.32,7095 ; v1(7175,7095) DD18.117@7292.32,7095 ; v1(9395,7095) DD22.117@9512.32,7095 ; v1(11635,7095) DD26.117@11752.32,7095
  Bottom Layer w12: v1(4741.39,7951) 4741.39,7819.39 4737,7815 4737,7132.23 4774.23,7095 v1@11637,7095
B03: DD1.16 DD14.116 DD18.116 DD22.116 DD26.116 | length 9630.1
  Top Layer w12: v1@4715.8,7887 DD1.16@4715.8,9332.5 ; v1(5055,7060) DD14.116@5173.07,7060 ; v1(7175,7060) DD18.116@7293.07,7060 ; v1(9395,7060) DD22.116@9513.07,7060 ; v1(11635,7060) DD26.116@11753.07,7060
  Bottom Layer w12: v1@4714.45,7887 4714.45,7123.55 4778,7060 v1@11637,7060
  other v1: 4716.8,7887
B04: DD1.15 DD14.115 DD18.115 DD22.115 DD26.115 | length 9671.3
  Top Layer w12: v1(4690.2,7951) DD1.15@4690.2,9332.5 ; v1(5055,7026) DD14.115@5172.82,7026 ; v1(7175,7026) DD18.115@7292.82,7026 ; v1(9395,7026) DD22.115@9512.82,7026 ; v1(11635,7026) DD26.115@11752.82,7026
  Bottom Layer w12: v1@4691.82,7951 4691.82,7114.18 4780,7026 v1@11637,7026
B05: DD1.14 DD14.114 DD18.114 DD22.114 DD26.114 | length 9712.5
  Top Layer w12: v1(4664.61,7887) DD1.14@4664.61,9332.5 ; v1(5055,6992) DD14.114@5172.57,6992 ; v1(7175,6992) DD18.114@7292.57,6992 ; v1(9395,6992) DD22.114@9512.57,6992 ; v1(11635,6992) DD26.114@11752.57,6992
  Bottom Layer w12: v1@4669.2,7887 4669.2,7104.8 4782,6992 v1@11637,6992
B06: DD1.13 DD14.113 DD18.113 DD22.113 DD26.113 | length 9760.2
  Top Layer w12: v1(4639.02,7951) DD1.13@4639.02,9332.5 ; v1(5055,6957) DD14.113@5173.06,6957 ; v1(7175,6957) DD18.113@7293.06,6957 ; v1(9395,6957) DD22.113@9513.06,6957 ; v1(11635,6957) DD26.113@11753.06,6957
  Bottom Layer w12: v1(4639.02,7951) 4639.02,7847.62 4646.57,7840.07 4646.57,7095.43 4785,6957 v1@11637,6957
B07: DD1.12 DD14.110 DD18.110 DD22.110 DD26.110 | length 9922.1
  Top Layer w12: v1(4613.43,7887) DD1.12@4613.43,9332.5 ; v1(5055,6854) DD14.110@5172.82,6854 ; v1(7175,6854) DD18.110@7292.82,6854 ; v1(9395,6854) DD22.110@9512.82,6854 ; v1(11635,6854) DD26.110@11752.82,6854
  Bottom Layer w12: v1(4613.43,7887) 4613.43,7821.57 4624.12,7810.88 4624.12,7086.13 4856.25,6854 v1(5055,6854) 5102,6901 7121,6901 v1@7168,6854 ; v1(7175,6854) 7363,6854 7444,6935 9314,6935 v1(9395,6854) v1@11629,6854
B08: DD1.11 DD14.109 DD18.109 DD22.109 DD26.109 | length 9993.2
  Top Layer w12: v1(4587.84,7951) DD1.11@4587.84,9332.5 ; v1(5055,6820) DD14.109@5173.07,6820 ; v1(7175,6820) DD18.109@7293.07,6820 ; v1(9395,6820) DD22.109@9513.07,6820 ; v1(11635,6820) DD26.109@11753.07,6820
  Bottom Layer w12: v1(4587.84,7951) 4587.84,7813.16 4601.77,7799.23 4601.77,7076.87 4858.64,6820 v1(5055,6820) 5114,6879 7105,6879 7164,6820 7374,6820 7467,6913 9302,6913 v1(9395,6820) v1@11629,6820
B09: DD1.19 DD2.19 DD9.16 | length 1081.9
  Top Layer w12: DD2.19@3971.57,9332.5 3971.57,9412.57 3993,9434 4863,9434 ; DD1.19@4792.57,9332.5 4792.57,9434
B10: DD2.18 DD14.108 DD18.108 DD22.108 DD26.108 | length 11078.3
  Top Layer w12: v1(3945.98,9241) DD2.18@3945.98,9332.5 ; v1(5055,6786) DD14.108@5173.06,6786 ; v1(7175,6786) DD18.108@7293.06,6786 ; v1(9395,6786) DD22.108@9513.06,6786 ; v1(11635,6786) DD26.108@11753.06,6786
  Bottom Layer w12: v1(3945.98,9241) 3945.98,9172.98 3928,9155 3928,8645.85 3665,8382.85 3665,7648.34 3800,7513.34 3800,6934 3906,6828 4818,6828 4860,6786 v1(5055,6786) 5126,6857 7095,6857 7166,6786 7377,6786 7481,6890 9291,6890 v1(9395,6786) v1@11629,6786
B11: DD2.17 DD14.107 DD18.107 DD22.107 DD26.107 | length 11137.6
  Top Layer w12: v1(3920.39,9217) DD2.17@3920.39,9332.5 ; v1(5055,6752) DD14.107@5172.8,6752 ; v1(7175,6752) DD18.107@7292.8,6752 ; v1(9395,6752) DD22.107@9512.8,6752 ; v1(11635,6752) DD26.107@11752.8,6752
  Bottom Layer w12: v1(3920.39,9217) 3920.39,9179.14 3905.6,9164.35 3905.6,8654.6 3643,8392 3643,7638 3777.6,7503.4 3777.6,6924.4 3896,6806 4806,6806 4860,6752 v1(5055,6752) 5138,6835 7084,6835 7167,6752 7381,6752 7497,6868 9279,6868 v1(9395,6752) v1@11629,6752
B12: DD2.16 DD14.106 DD18.106 DD22.106 DD26.106 | length 11191.4
  Top Layer w12: v1(3894.8,9241) DD2.16@3894.8,9332.5 ; v1(5055,6718) DD14.106@5172.55,6718 ; v1(7175,6718) DD18.106@7292.55,6718 ; v1(9395,6718) DD22.106@9512.55,6718 ; v1(11635,6718) DD26.106@11752.55,6718
  Bottom Layer w12: v1(3894.8,9241) 3894.8,9184.8 3883.57,9173.57 3883.57,8663.84 3621,8401.27 3621,7628 3755.57,7493.43 3755.57,6915.12 3886.69,6784 4786,6784 4852,6718 v1(5055,6718) 5150,6813 7074.89,6813 v1@7169.89,6718 ; v1(7175,6718) 7382,6718 7510,6846 9267,6846 v1(9395,6718) v1@11629,6718
B13: DD2.15 DD14.105 DD18.105 DD22.105 DD26.105 | length 11259.9
  Top Layer w12: v1(3869.2,9217) DD2.15@3869.2,9332.5 ; v1(5055,6683) DD14.105@5173.08,6683 ; v1(7175,6683) DD18.105@7293.08,6683 ; v1(9395,6683) DD22.105@9513.08,6683 ; v1(11635,6683) DD26.105@11753.08,6683
  Bottom Layer w12: v1(3869.2,9217) 3869.2,9191.2 3861.04,9183.04 3861.04,8673.04 3599,8411 3599,7618 3733.04,7483.96 3733.04,6905.61 3876.65,6762 4773,6762 4852,6683 v1(5055,6683) 5163,6791 7065.77,6791 v1@7173.77,6683 ; v1(7175,6683) 7379,6683 7520,6824 9254,6824 v1(9395,6683) v1@11629,6683
B14: DD2.14 DD14.104 DD18.104 DD22.104 DD26.104 | length 11323.6
  Top Layer w12: v1(3843.61,9241) DD2.14@3843.61,9332.5 ; v1(5055,6649) DD14.104@5173.05,6649 ; v1(7175,6649) DD18.104@7293.05,6649 ; v1(9395,6649) DD22.104@9513.05,6649 ; v1(11635,6649) DD26.104@11753.05,6649
  Bottom Layer w12: v1(3843.61,9241) 3843.61,9201.61 3839.02,9197.02 3839.02,8682.47 3574,8417.45 3574,7611.67 3711.02,7474.65 3711.02,6895.98 3867,6740 4762,6740 4853,6649 v1(5055,6649) 5175,6769 7055,6769 v1(7175,6649) 7384,6649 7537,6802 9242,6802 v1(9395,6649) v1@11629,6649
B15: DD2.13 DD14.103 DD18.103 DD22.103 DD26.103 | length 11386.4
  Top Layer w12: v1(3818.02,9217) DD2.13@3818.02,9332.5 ; v1(5055,6615) DD14.103@5172.8,6615 ; v1(7175,6615) DD18.103@7292.8,6615 ; v1(9395,6615) DD22.103@9512.8,6615 ; v1(11635,6615) DD26.103@11752.8,6615
  Bottom Layer w12: v1@3816.39,9217 3816.39,8695.11 3547,8425.72 3547,7607 3688.39,7465.61 3688.39,6886.61 3858,6717 4751.47,6717 4853.47,6615 v1(5055,6615) 5187,6747 7043,6747 v1(7175,6615) 7383,6615 7548,6780 9230,6780 v1(9395,6615) v1@11629,6615
B16: DD2.12 DD14.102 DD18.102 DD22.102 DD26.102 | length 11451.8
  Top Layer w12: v1(3792.43,9241) DD2.12@3792.43,9332.5 ; v1(5055,6580) DD14.102@5172.83,6580 ; v1(7175,6580) DD18.102@7292.83,6580 ; v1(9395,6580) DD22.102@9512.83,6580 ; v1(11635,6580) DD26.102@11752.83,6580
  Bottom Layer w12: v1@3793.77,9241 3793.77,8710.77 3523,8440 3523,7599.06 3665.77,7456.3 3665.77,6877.23 3848,6695 4740.88,6695 4855.88,6580 v1(5055,6580) 5200,6725 7030,6725 v1(7175,6580) 7382,6580 7560,6758 9217,6758 v1(9395,6580) v1@11629,6580
B17: DD2.11 DD14.101 DD18.101 DD22.101 DD26.101 | length 11514.4
  Top Layer w12: v1(3766.84,9217) DD2.11@3766.84,9332.5 ; v1(5055,6546) DD14.101@5173.09,6546 ; v1(7175,6546) DD18.101@7293.09,6546 ; v1(9395,6546) DD22.101@9513.09,6546 ; v1(11635,6546) DD26.101@11753.09,6546
  Bottom Layer w12: v1@3771.14,9217 3771.14,8720.14 3501,8450 3501,7588.88 3643.14,7446.73 3643.14,6867.86 3838,6673 4731.26,6673 4858.26,6546 v1(5055,6546) 5212,6703 7018,6703 v1(7175,6546) 7387,6546 7577,6736 9205,6736 v1(9395,6546) v1@11629,6546
B18: DD3.16 DD30.10
B19: DD8.15 DD34.11
B20: DD3.12 DD10.1
B21: DD3.9 DD10.3
B22: DD3.7 DD10.5
B23: DD3.5 DD10.9
B25: DD4.18 DD6.3
B26: DD4.16 DD6.2
B27: DD4.12 DD16.4 DD20.4 DD24.4 DD28.4 | length 6998.4
  Top Layer w12: v1(5142,5487) DD16.4@5142,5586.11 ; v1@7321.61,5487.39 DD20.4@7321.61,5586.5 ; v1(9499,5486) DD24.4@9499,5586.11 ; v1(11741.61,5486) DD28.4@11741.61,5586.5
  Bottom Layer w12: v1@5142,5489 7322,5488.01 9499,5487.02 v1(11741.61,5486)
  other v1: 7322,5487
B28: DD4.9 DD16.1 DD16.2 DD20.1 DD20.2 DD24.1 DD24.2 DD28.1 DD28.2 | length 7283.1
  Top Layer w12: DD16.1@5064.84,5586.5 5064.84,5512.16 5065.57,5511.43 v1(5091,5511.43) DD16.2@5091,5585.93 ; DD20.1@7244.84,5586.5 7244.84,5514.02 7245.43,5513.43 7270.43,5513.43 DD20.2@7270.43,5586.5 ; DD24.1@9421.84,5586.5 9421.84,5504.84 9445.16,5504.84 9447.43,5507.12 DD24.2@9447.43,5586.5 ; DD28.1@11665.57,5585.77 v1(11665.57,5511.43) 11690.43,5511.43 DD28.2@11690.43,5586.5
  Bottom Layer w12: v1(5091,5511.43) v1(11665.57,5511.43)
  other v1: 9447.43,5511.12 7270,5513
B29: DD4.7 DD10.11
B30: DD4.5 DD6.1
B31: C61.2 DD4.3 DD14.34 DD14.50 DD15.9 DD18.34 DD19.9 DD22.34 DD23.9 DD26.34 DD27.9 | length 11058.5
  Top Layer w12: 3790,6888.62 C61.2@3790,6000 4244,6000 4280,5964 DD15.9@4280,5794.33 ; DD14.50@3946.81,6888.62 3712.38,6888.62 3671,6930 3671,7341 3723,7393 3781,7393 3824.65,7436.65 DD14.34@3946.81,7436.65 ; v1(5864,5886) 5864,6365.24 5970,6471.24 5970,7417 5989.65,7436.65 DD18.34@6066.81,7436.65 ; DD19.9@6280,5794.33 v1@6280,5887 ; DD23.9@8740,5794.33 v1(8740,5887) ; DD27.9@10800,5794.33 v1(10800,5887)
  Bottom Layer w12: v1(4280,5887) v1@10798,5887
  other v1: 6280,5886
B32: DD6.13 DD14.11
B33: DD6.14 DD14.12
B34: DD6.15 DD14.2
B35: DD6.12 DD7.11
B36: DD6.10 DD8.11
B37: DA1.19 DA6.9 DD7.3 DD8.3 DD12.3 DD14.79 | length 7629.6
  Top Layer w12: DA6.9@4200,5230 4508.62,5538.62 DD14.79@4508.62,6326.81 ; v1(4323,8589) DD7.3@4323,8661.1 ; v2(4750,4882) 4750,4760 DA1.19@4800,4710 ; v1@5477.13,6065 5477.13,8824.13 5575,8922 DD12.3@5575,9158.9
  Bottom Layer w12: DA6.9@4200,5230 4200,4906 4224,4882 v2(4750,4882) ; v1(4323,8589) v1@5477.13,8589 ; v1@4511.34,6065 v1(5479,6065)
  other v1: 4508.62,6065 5477.13,8591
B38: DA1.20 DA6.8 DD7.4 DD8.4 DD12.4 DD14.80 | length 7550.5
  Top Layer w12: v1(4273,8541) DD7.4@4273,8661.1 ; DA6.8@4300,5230 4542.87,5472.87 DD14.80@4542.87,6326.81 ; DA1.20@4700,4810 v2(4700,4921) ; v1(5220,8541) DD8.4@5220,8661.1 ; v1(5503,6089) 5503,8812 5625,8934 DD12.4@5625,9158.9
  Bottom Layer w12: v1(4273,8541) v1(5503,8541) ; DA6.8@4300,5230 4298,5228 4298,4956 4333,4921 v2(4700,4921) ; v1(4542.87,6089) v1(5503,6089)
B39: DA1.21 DA6.7 DD7.7 DD8.7 DD12.7 DD14.81 | length 7797.5
  Top Layer w12: v1@4123,8565 DD7.7@4123,8661.1 ; DA6.7@4400,5225 4577.13,5402.13 DD14.81@4577.13,6326.81 ; v2(4647,4955) 4647,4763 DA1.21@4700,4710 ; v1(5070,8565) DD8.7@5070,8661.1 ; v1(5527,6113) 5527,8801 5656,8930 5748,8930 5775,8957 DD12.7@5775,9158.9
  Bottom Layer w12: v1(4121,8565) v1(5527,8565) ; DA6.7@4400,5225 4335,5160 4335,4962 4342,4955 v2(4647,4955) ; v1(4577.13,6113) v1(5527,6113)
B40: DA1.22 DA6.6 DD8.8 DD12.8 DD14.82 | length 6660.7
  Top Layer w12: DA6.6@4500,5230 4611.38,5341.38 DD14.82@4611.38,6326.81 ; DA1.22@4600,4810 v2(4600,4998) ; v1@5020,8519 DD8.8@5020,8661.1 ; 5549,8791.89 5665.11,8908 5764,8908 5825,8969 DD12.8@5825,9158.9 ; v1(5551,6136) 5551,8791.89
  Bottom Layer w12: DA6.6@4500,5230 4357,5087 4357,5019 4378,4998 v2(4600,4998) ; v1(4611.38,6137) v1@5551,6137 ; v1(5020,8517) v1(5551,8517)
B41: DA1.23 DA6.5 DD8.13 DD14.83 | length 5300.9
  Top Layer w12: DA1.23@4600,4710 4553,4757 4553,5183 4645.63,5275.63 DD14.83@4645.63,6326.81 ; v1@5020,8150 DD8.13@5020,8298.9 ; v1(5575,6162) v1(5575,8155)
  Bottom Layer w12: v1(4645.63,6162) v1(5575,6162) ; v1(5020,8155) v1(5575,8155)
B42: DA1.24 DA6.4 DD8.14 DD14.84 | length 5266.9
  Top Layer w12: DA1.24@4500,4810 v2@4500,5121 ; DD14.84@4679.88,6326.81 4679.88,5250.12 DA6.4@4700,5230 ; v1(5070,8179) DD8.14@5070,8298.9 ; v1(5599,6186) v1(5599,8179)
  Bottom Layer w12: v2(4501,5121) 4666,5121 4702,5157 4702,5228 DA6.4@4700,5230 ; v1(4679.88,6186) v1(5599,6186) ; v1(5070,8179) v1(5599,8179)
B45: DD5.6 DD30.2
B46: DD6.4 DD16.5 DD16.12 DD16.13 | length 4035.3
  Top Layer w12: DD16.13@5090.43,5773.5 5090.43,5853.43 ; 5091,5854 5116.59,5854 5116.59,5709.41 5167.2,5658.8 v1(5167.2,5456.2) ; v1(5479,5456) 5479,6013 5652,6186 5652,6454 5763,6565 5763,8106 5858,8201 5957,8201 5995,8239 DD6.4@5995,8383.54
  Bottom Layer w12: v1(5167.2,5456.2) v1@5479,5456.2
B47: DD6.5 DD20.5 DD20.12 DD20.13 | length 5691.7
  Top Layer w12: v1(5504,5401) 5504,6006.71 5677,6179.71 5677,6443.64 5785,6551.64 5785,8096 5867,8178 5988,8178 6045,8235 DD6.5@6045,8383.54 ; DD20.13@7270.43,5773.5 7270.43,5853.57 7296.57,5853.57 7296.57,5709.43 7347.2,5658.8 7347.2,5465.2 7334,5452 v1@7334,5399
  Bottom Layer w12: v1(5504,5401) v1(7331,5399)
B48: DD6.6 DD24.5 DD24.12 DD24.13 | length 7823.8
  Top Layer w12: v1@5527,5434 5527,5995.77 5701,6169.77 5701,6433.7 5807,6539.7 5807,8085 5878,8156 6019,8156 6095,8232 DD6.6@6095,8383.54 ; DD24.13@9447.43,5773.5 9447.43,5845.41 9450,5847.98 9473.02,5847.98 9473.02,5705.98 9524.2,5654.8 v1(9524.2,5436.2)
  Bottom Layer w12: v1(5528,5435) 7329,5435 7363,5401 7597,5401 7632.2,5436.2 v1(9524.2,5436.2)
B49: DD6.7 DD28.5 DD28.12 DD28.13 | length 9606.5
  Top Layer w12: v1(5552,5460) 5552,5989.66 5723,6160.66 5723,6424.59 5829,6530.59 5829,8071 5888,8130 6053,8130 6145,8222 DD6.7@6145,8383.54 ; v1(11767.2,5461) DD28.5@11767.2,5586.5
  Bottom Layer w12: v1@5552,5461 v1(11767.2,5461)
B50: DD6.11 DD15.5 DD15.6 | length 5371
  Top Layer w12: DD15.5@4230,5585.67 4230,5497 4280,5497 DD15.6@4280,5585.67 ; v1(5576,5371) 5576,5981.13 5746,6151.13 5746,6415.06 5851,6520.06 5851,8054 5903,8106 6127,8106 6247,8226 6247,8459 6223,8483 6113,8483 6095,8501 DD6.11@6095,8576.46
  Bottom Layer w12: v1@4280,5497 4280,5405 4313,5372 v1@5576,5372
  other v1: 4279,5498
B51: DD6.9 DD12.11
B52: DD7.2 DD11.2 DD34.2
B53: DD7.5 DD11.4 DD34.4
B54: DD7.6 DD11.6 DD34.6
B55: DD8.2 DD11.8
B56: DD8.5 DD11.11
B57: DD8.6 DD11.13
B58: DD8.9 DD11.15
B59: DD8.12 DD11.17 | length 817.9
  Top Layer w12: v1(4970,8130) DD8.12@4970,8298.9
  Bottom Layer w12: v1(4970,8130) 5619,8130
B60: DD9.14 DD14.58 DD18.58 DD22.58 DD26.58 | length 11841.7
  Top Layer w12: DD14.58@3946.81,6614.61 4017.61,6614.61 v1(4051,6648) ; DD9.14@5669,10461.1 5669,10302 5702,10269 5994.75,10269 6075,10188.75 6075,8974 5898,8797 5767,8797 5739,8769 v1(5739,6676) ; DD18.58@6066.81,6614.61 6149.61,6614.61 6163,6628 v1@6163,6674 ; DD22.58@8286.81,6614.61 8367.61,6614.61 8390,6637 v1(8390,6692) ; DD26.58@10526.81,6614.61 10603.39,6614.61 10621,6597 v1(10621,6522)
  Bottom Layer w12: v1@4051,6649 4724,6649 4854,6519 5067,6519 5224,6676 7010.89,6676 7164.89,6522 ; 7167.89,6522 7397,6522 7568,6693 9214,6693 9385,6522 v1(10621,6522)
  other v1: 6163,6676
B61: DD9.12 XT1.7C | length 2005.9
  Top Layer w12: v1(5524,10789) 5676,10789 5769,10696 DD9.12@5769,10461.1
  Bottom Layer w12: XT1.7C@4352,11378 4352,11256 4819,10789 v1(5524,10789)
B62: DD9.9 DD14.53 DD14.55 | length 6113.7
  Top Layer w12: DD14.55@3946.81,6717.36 4104.64,6717.36 ; DD14.53@3946.81,6785.87 4065.13,6785.87 4106,6745 v1@4106,6625 ; v1(5623,6649) 5623,8779 5730,8886 5861.14,8886 5986,9010.86 5986,10151.89 5957.89,10180 5792,10180 5769,10157 DD9.9@5769,10098.9
  Bottom Layer w12: v1@4106,6625 4715.75,6625 4843.75,6497 5077,6497 5230,6650 v1@5623,6650
  other v1: 4105,6625
B63: DD9.7 DD18.53 DD18.55 | length 5160.7
  Top Layer w12: v1(5655,6650) 5655,8779.75 5739.25,8864 5870.25,8864 6008,9001.75 6008,10161 5967,10202 5698,10202 5669,10173 DD9.7@5669,10098.9 ; DD18.55@6066.81,6717.36 6218.64,6717.36 ; DD18.53@6066.81,6785.87 6187.13,6785.87 6220,6753 v1(6220,6652)
  Bottom Layer w12: v1@5655,6652 v1(6220,6652)
B64: DD9.5 DD22.53 DD22.55 | length 7777.7
  Top Layer w12: DD9.5@5569,10098.9 5569,10173 5620,10224 5976.11,10224 6030,10170.11 6030,8992.64 5879.36,8842 5748.36,8842 5691,8784.64 5691,6652 5660,6621 v1(5623,6621) ; DD22.55@8286.81,6717.36 8438.36,6717.36 ; DD22.53@8286.81,6785.87 8418.13,6785.87 8442,6762 v1(8442,6658)
  Bottom Layer w12: v1@5623,6623 6229,6623 6260,6654 7000,6654 7157,6497 7416,6497 7579,6660 v1@8440,6660
B65: DD9.3 DD26.53 DD26.55 | length 10408
  Top Layer w12: DD9.3@5469,10098.9 5469,10211 5505,10247 5985.64,10247 6053,10179.64 6053,8983.11 5888.89,8819 5757.89,8819 5713,8774.11 5713,6642 5658,6587 v1@5621,6587 ; DD26.55@10526.81,6717.36 10664.64,6717.36 ; DD26.53@10526.81,6785.87 10637.13,6785.87 10667,6756 v1(10667,6498)
  Bottom Layer w12: v1(5623,6587) 5658,6587 5672,6601 6249,6601 6280,6632 6990.72,6632 7149.72,6473 7430,6473 7590,6633 9241,6633 9376,6498 v1(10667,6498)
B66: DD10.10 DD16.9 DD16.10 DD20.9 DD20.10 DD24.9 DD24.10 DD28.9 DD28.10 | length 7418.6
  Top Layer w12: DD16.10@5167.2,5773.5 5167.2,5852.8 v1(5192.8,5852.8) DD16.9@5192.8,5773.5 ; DD20.10@7347.2,5773.5 7347.2,5852.8 v1(7372.8,5852.8) DD20.9@7372.8,5773.5 ; v1(7890,5854) DD10.10@7890,5934.33 ; DD24.10@9524.2,5773.5 9524.2,5852.8 v1(9549.8,5852.8) DD24.9@9549.8,5773.5 ; DD28.10@11767.2,5773.5 11767.2,5852.8 v1(11792.8,5852.8) DD28.9@11792.8,5773.5
  Bottom Layer w12: v1@5191.2,5852.8 v1(11792.8,5852.8)
B67: DD10.12 XT1.8C | length 3089.7
  Top Layer w12: v1(5606,10845) 5682.77,10845 6120,10407.77 6120,10162 6547.73,9734.27 6547.73,9612
  Bottom Layer w12: XT1.8C@4452,11378 4452,11298 4905,10845 v1(5606,10845)
B68: DD10.2 DD14.20
B69: DD10.4 DD18.20
B70: DD10.6 DD22.20
B71: DD10.8 DD26.20 | length 2340.7
  Top Layer w12: DD10.8@7990,5934.33 v1(7990,6014)
  Bottom Layer w12: v1(7990,6014) 10251,6014
B72: DD11.18 XT1.11C | length 2711.9
  Top Layer w12: DD11.18@6795,10461.1 v1@6795,10608
  Bottom Layer w12: XT1.11C@4752,11378 4752,11276 5124,10904 6746,10904 6794,10856 v1(6794,10609)